# Altium PCB RYA_ESC.PcbDoc (part 1 of 4)
Units mm, origin at the board's own origin, x right, y up, seen from the top; angles counter-clockwise.
Board outline 81.86 x 50.16 mm, 4 copper layers (Top Layer, Signal1, Signal2, Bottom Layer), stack 1.586 mm thick; 309 components, 155 nets, 862 pads, 372 vias.
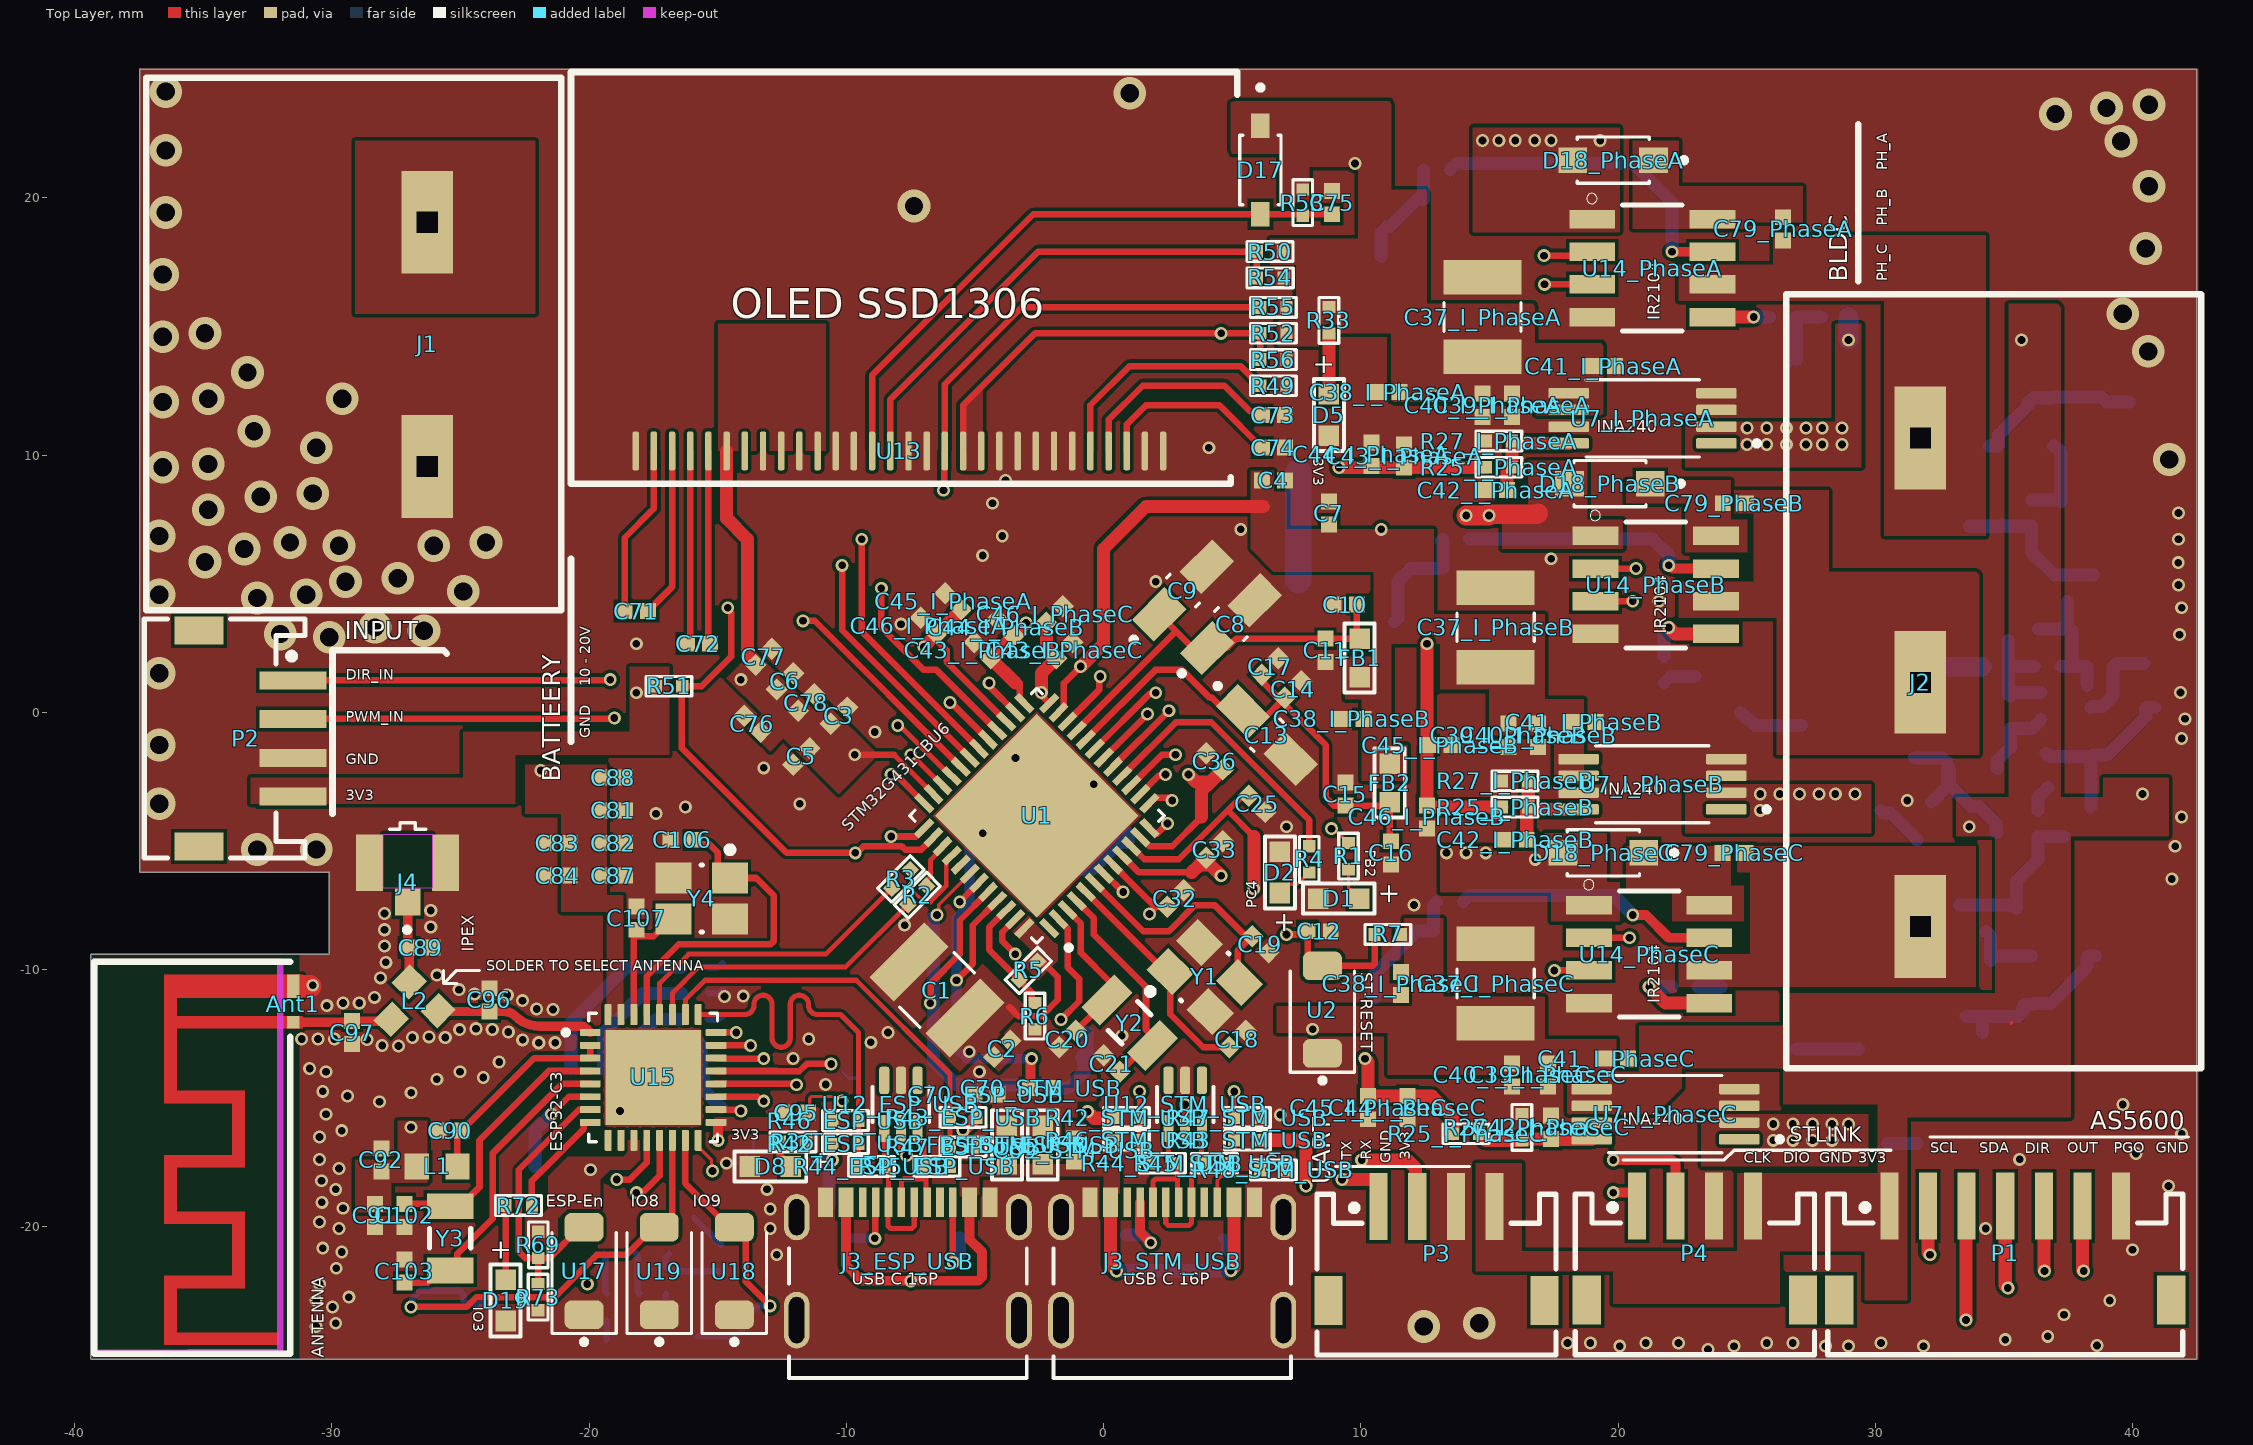
[diagram p0: Top Layer view]
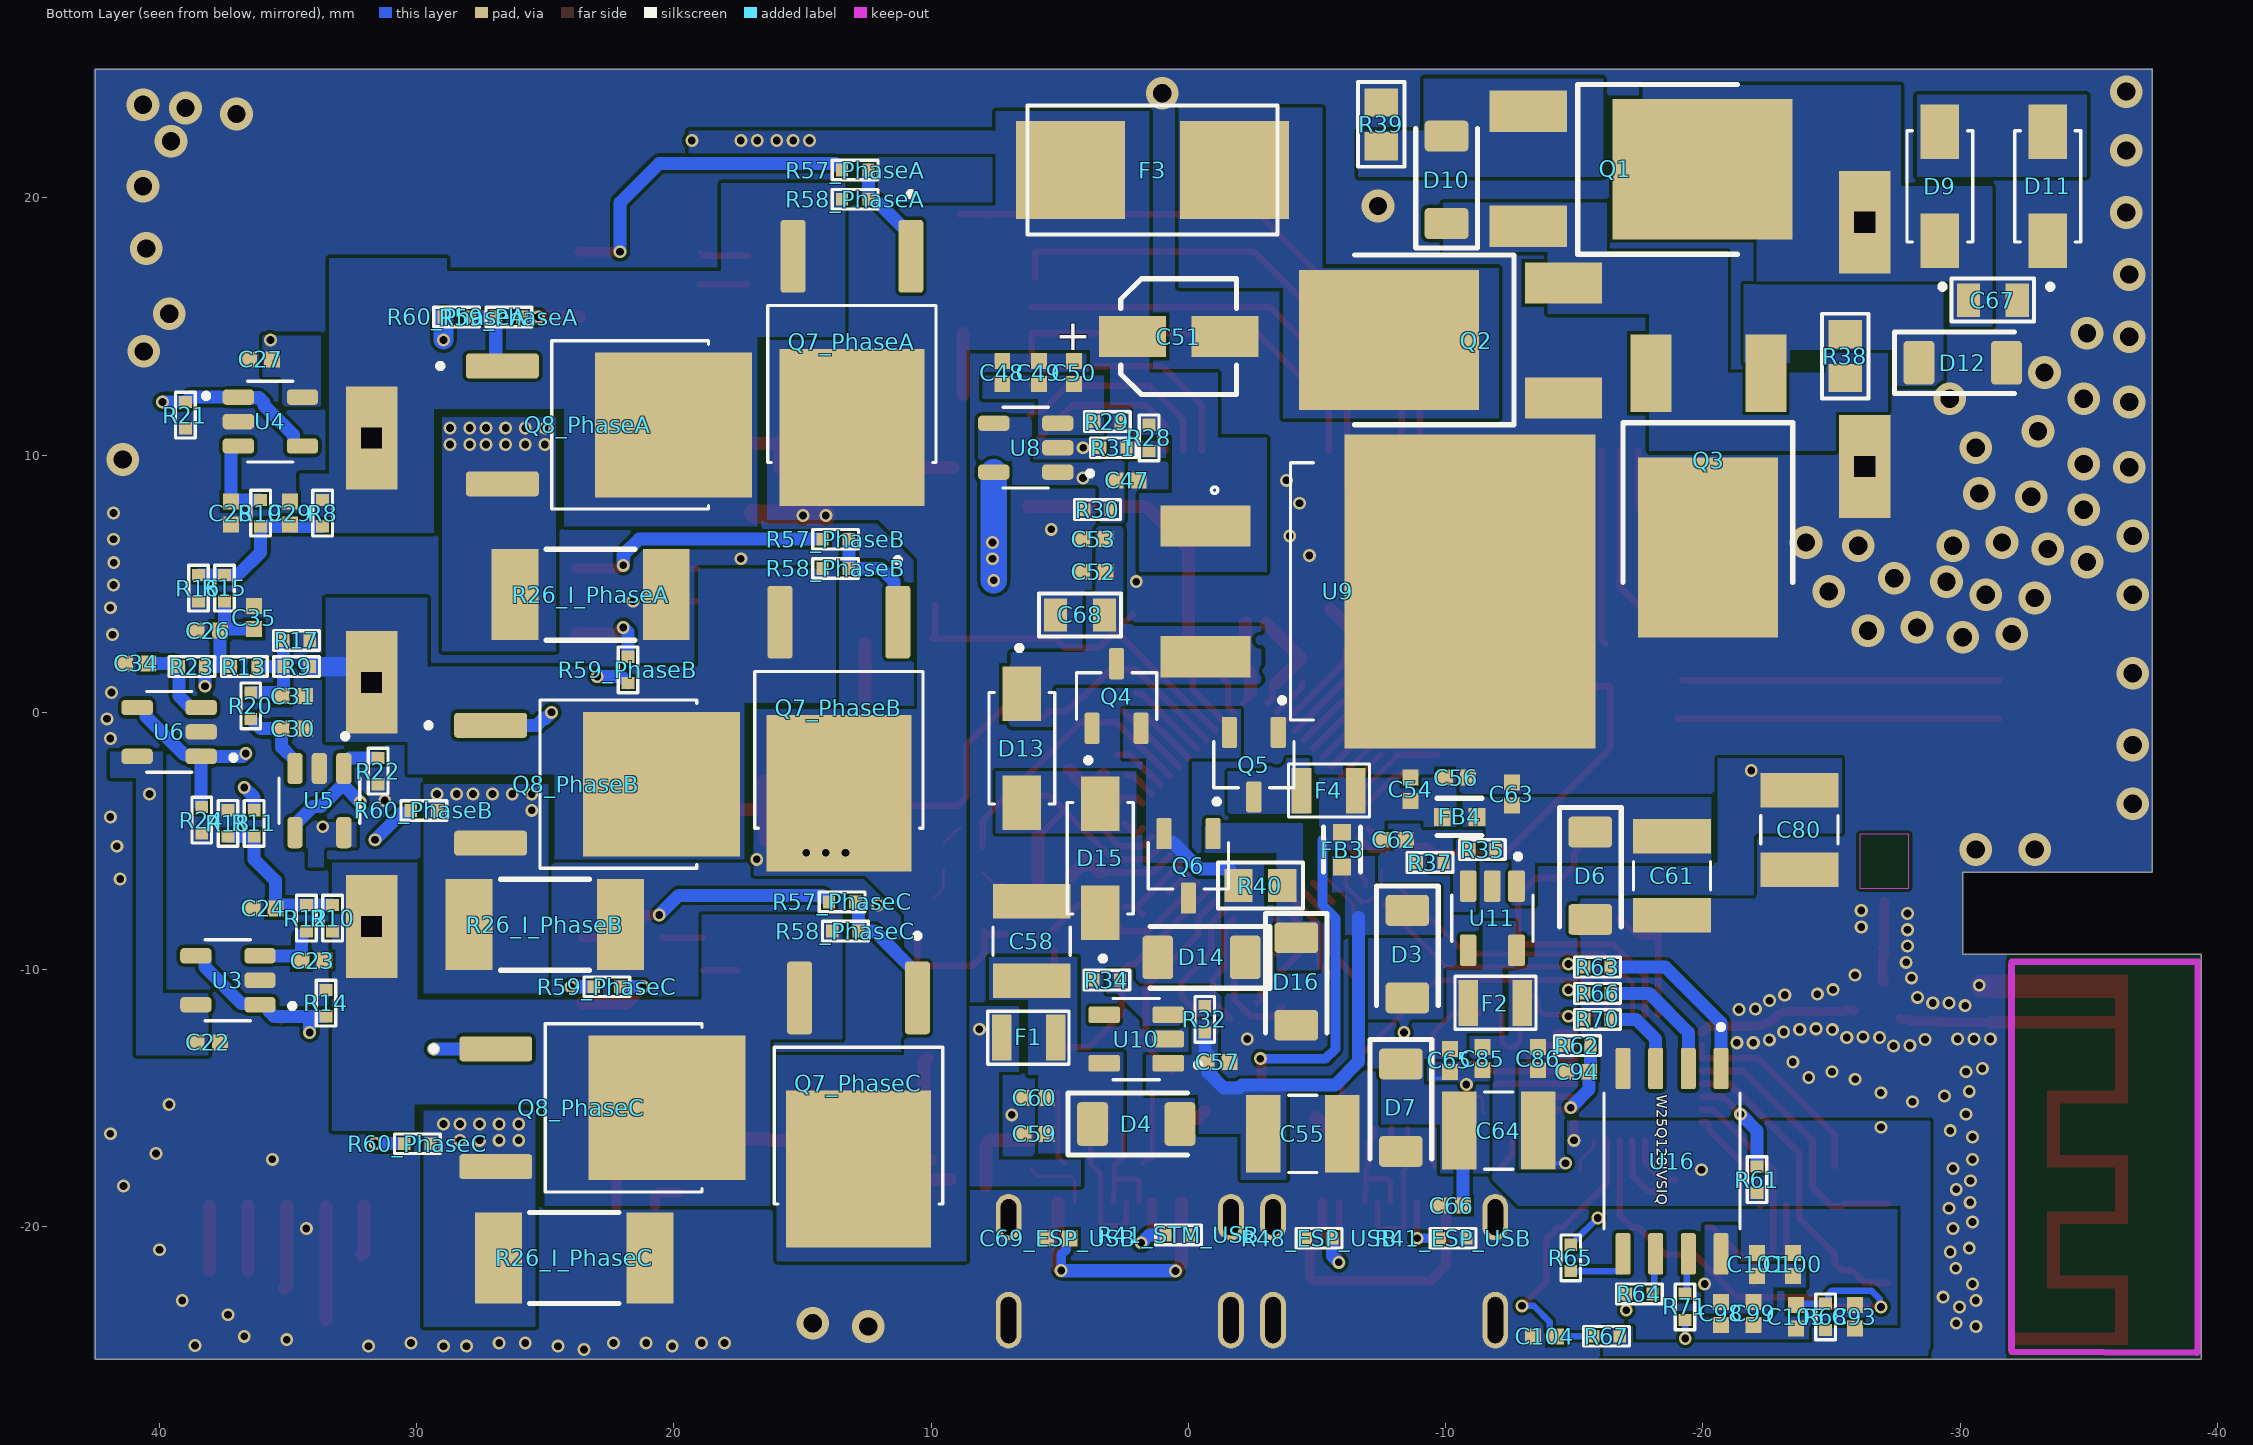
[diagram p1: Bottom Layer view, seen from below]
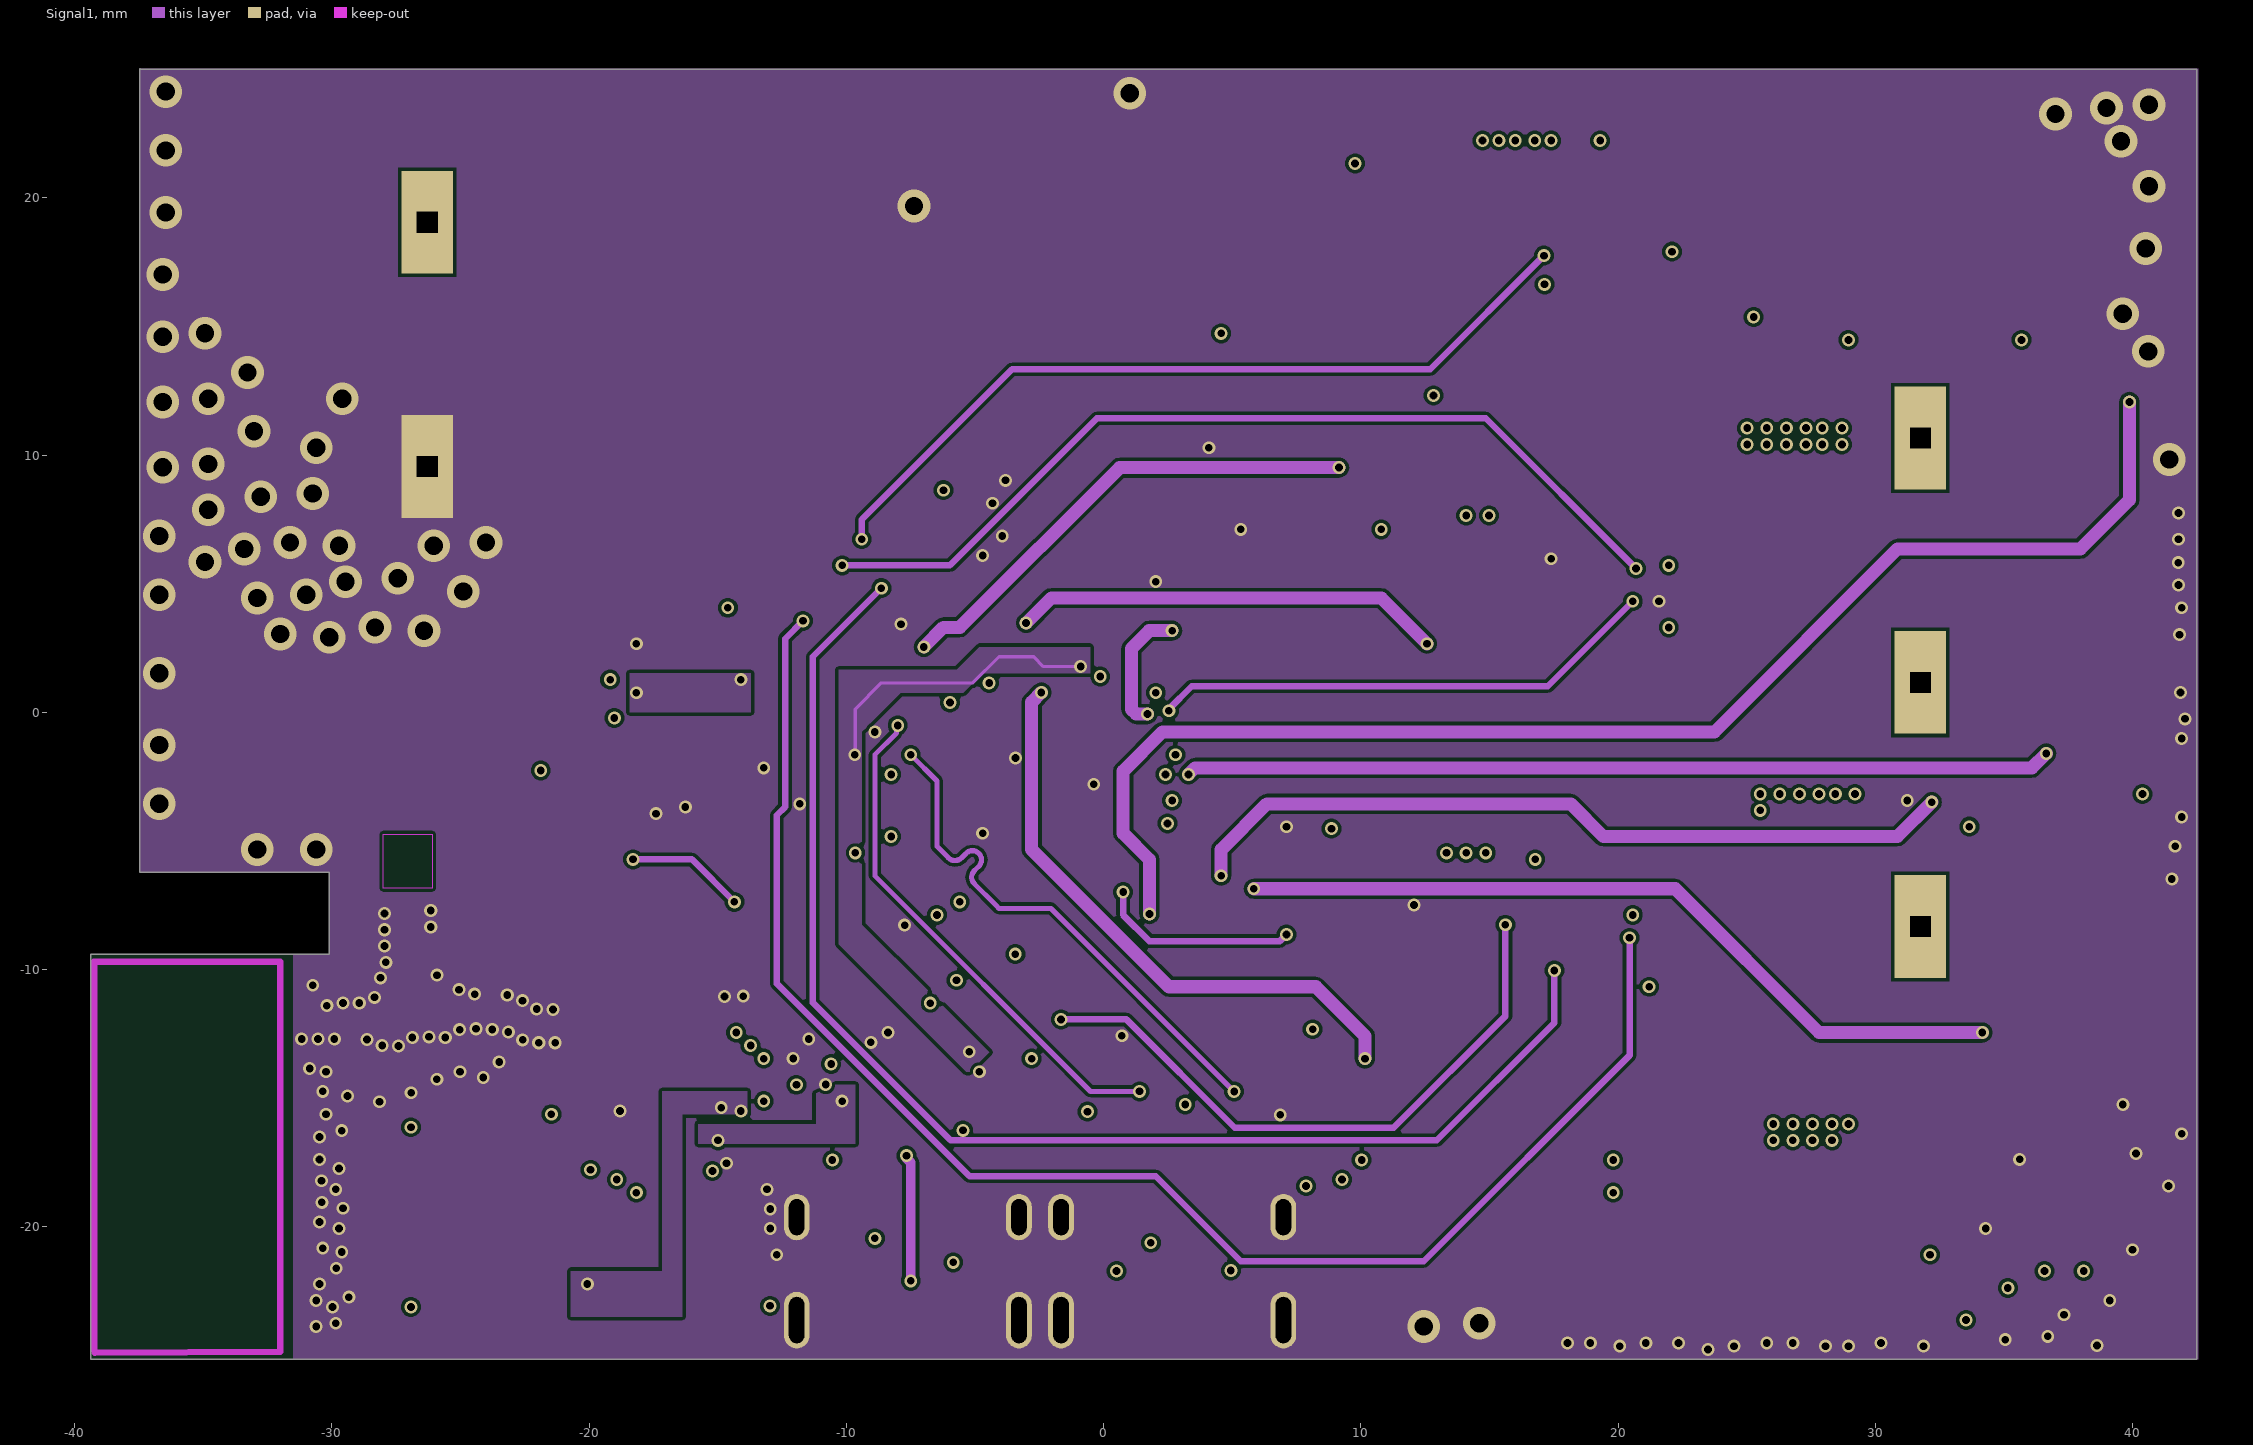
[diagram p2: Signal1]
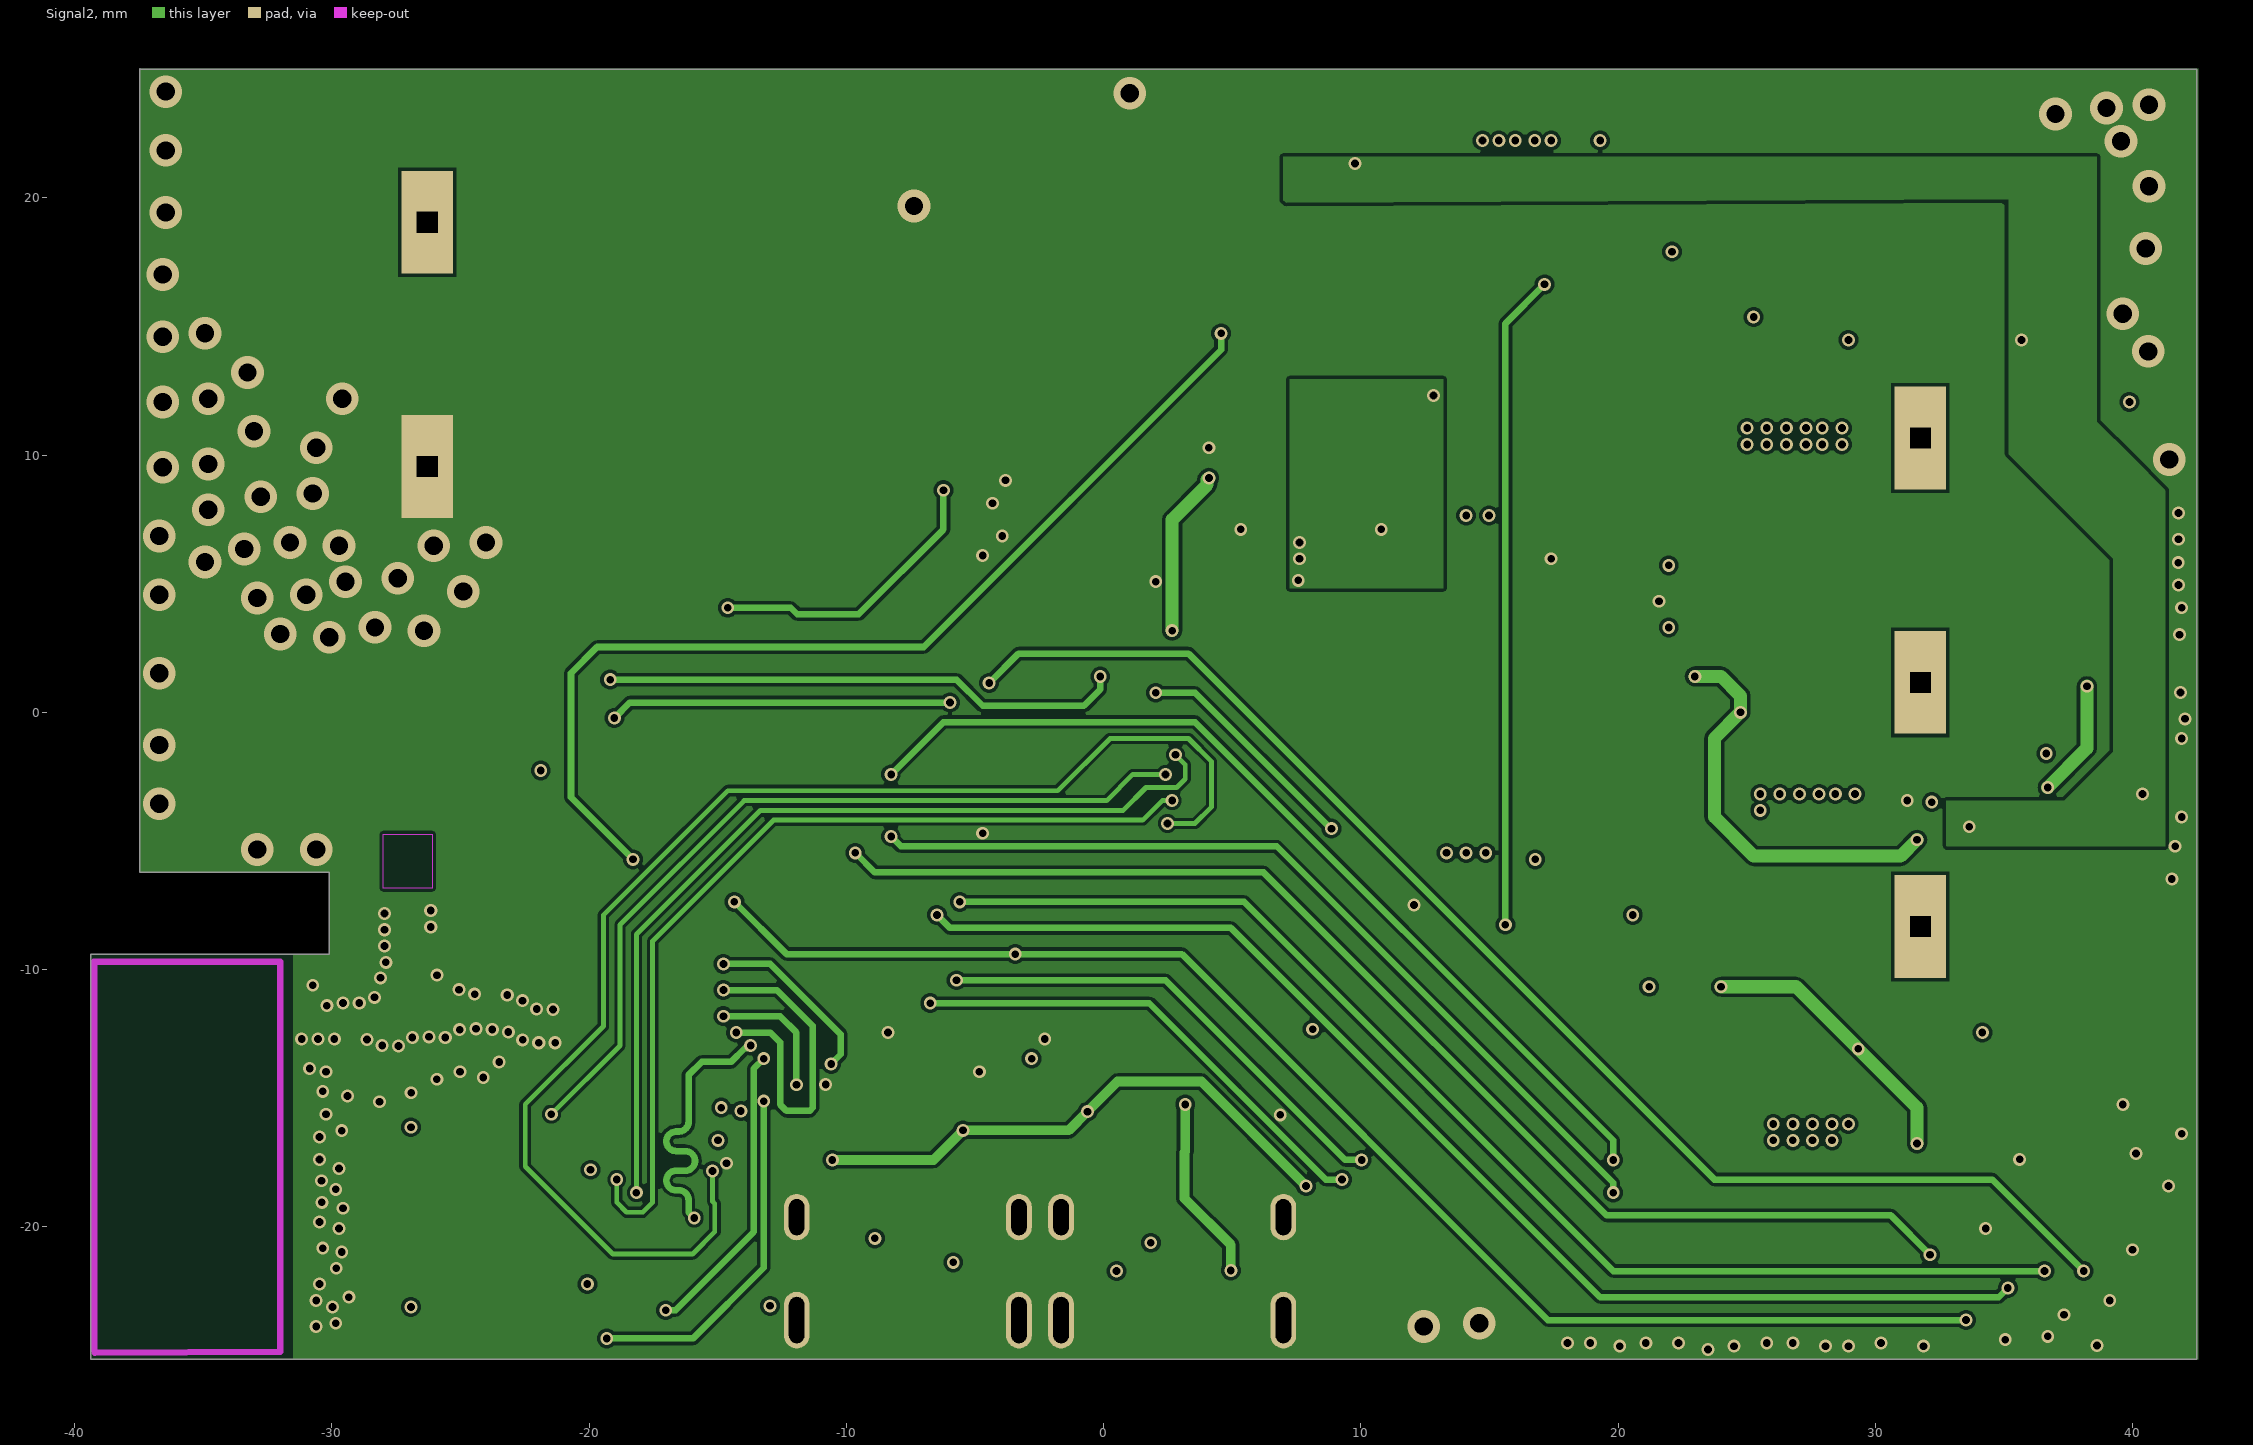
[diagram p3: Signal2]
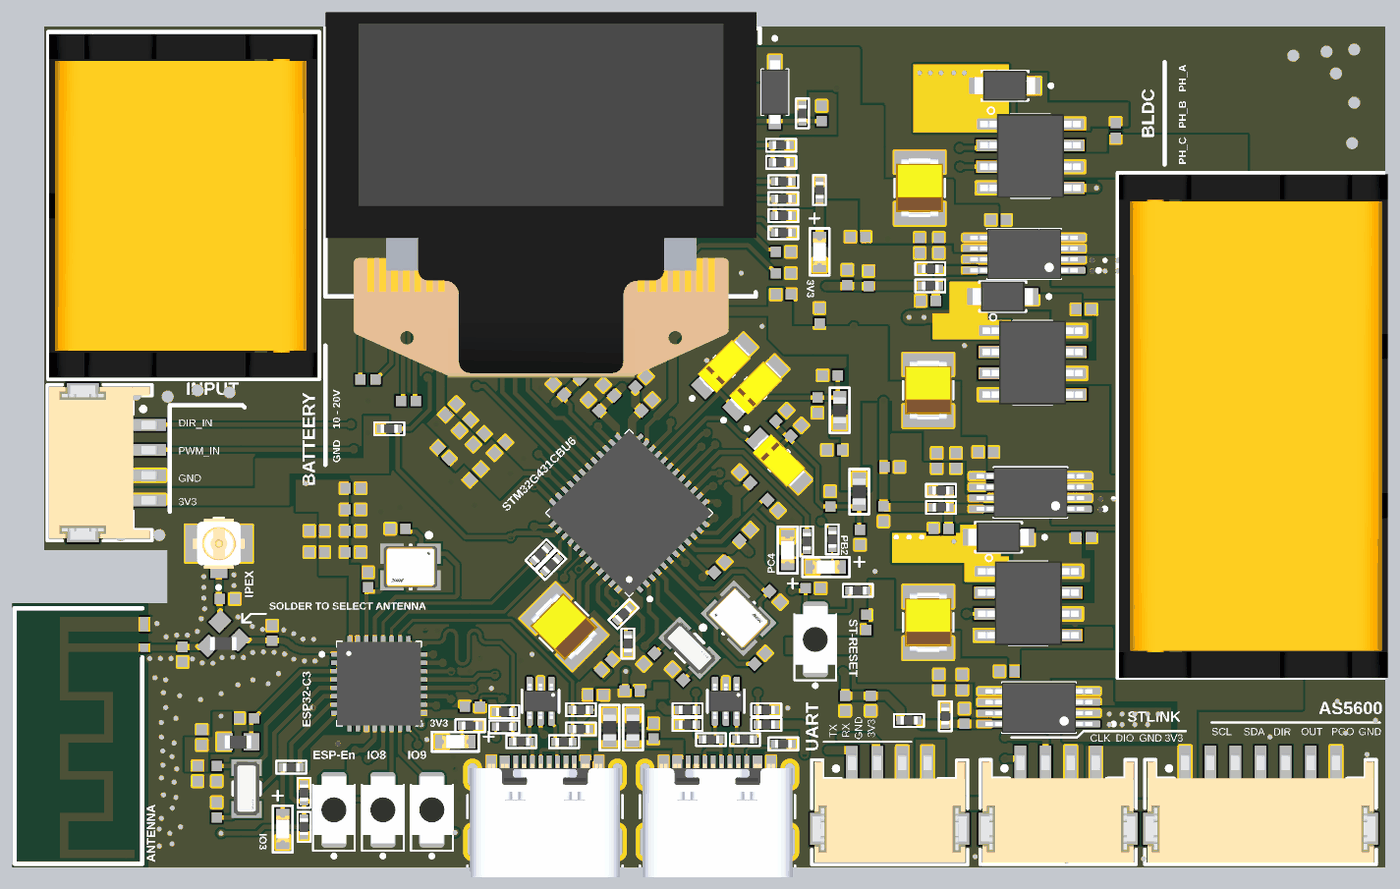
[diagram p6: 3D render of the assembled board from above, using the file's embedded part models]
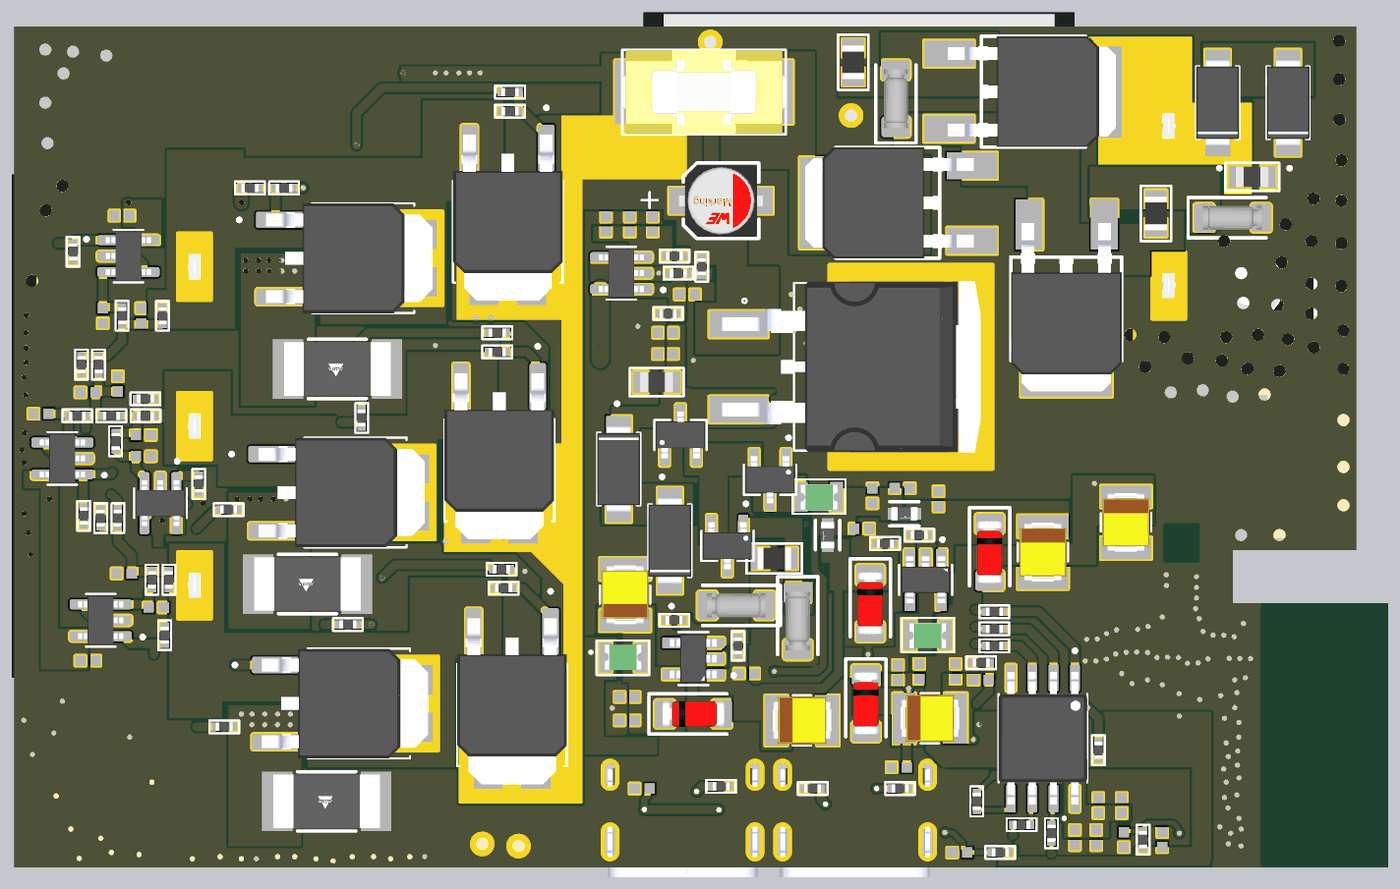
[diagram p7: 3D render of the assembled board from below, using the file's embedded part models]

## Layer stack, top to bottom
Top Solder: solder mask 0.0102, Solder Resist, Dk 3.5
Top Layer: signal copper 0.035
Dielectric 2: prepreg 0.2104, PP-022, Dk 4.5
Signal1: signal copper 0.0152
Dielectric 1: dielectric 1.065, FR-4, Dk 4.6
Signal2: signal copper 0.0152
Dielectric 3: prepreg 0.2104, PP-022, Dk 4.5
Bottom Layer: signal copper 0.035
Bottom Solder: solder mask 0.0102, Solder Resist, Dk 3.5

## Board outline
-39.37,-25.146 -39.37,-9.398 -30.099,-9.398 -30.099,-6.223 -37.465,-6.223 -37.465,25.019 -37.446,25 42.491,25 42.491,-25.146

## Design rules (kind name [scope] priority, off if disabled: settings)
Clearance PolyGND_Clearance [InNet('GND')] p1: gap=0.127 ignorepadtopadclearanceinfootprint=FALSE except(0: SMDPad-Via)
Clearance [All] p2: gap=0.127 ignorepadtopadclearanceinfootprint=FALSE except(0: SMDPad-Via)
DiffPairsRouting [All] p1: maxlimit=0.254 minlimit=0.254 mostfreqgap=0.254 toplayer_minwidth=0.2 toplayer_maxwidth=0.381 toplayer_prefwidth=0.2 midlayer1_minwidth=0.2 midlayer1_maxwidth=0.381 midlayer1_prefwidth=0.2 midlayer2_minwidth=0.2 midlayer2_maxwidth=0.381 midlayer2_prefwidth=0.2 bottomlayer_minwidth=0.2 bottomlayer_maxwidth=0.381 bottomlayer_prefwidth=0.2 maxuncoupledlength=12.7
HoleSize [All] p1: absolutevalues=TRUE maxlimit=500 minlimit=0.025 maxpercent=80.000 minpercent=20.000
HoleToHoleClearance [All] p1: gap=0.127 allowstackedmicrovias=TRUE
MatchedLengths "Schematic Matched Net Lengths_1" [InDifferentialPairClass('USB_Out')] p1: tolerance=25.4 checknetsindiffpair=FALSE checkdiffpairvsdiffpair=TRUE checkxsignals=TRUE checkothers=TRUE usedelayunits=TRUE delaytolerance=5.000000
MatchedLengths "Schematic Matched Net Lengths" [InDifferentialPairClass('USB_In')] p2: tolerance=25.4 checknetsindiffpair=FALSE checkdiffpairvsdiffpair=TRUE checkxsignals=TRUE checkothers=TRUE usedelayunits=TRUE delaytolerance=5.000000
MinimumSolderMaskSliver [All] p1: minsoldermaskwidth=0.001
PlaneConnect [All] p1: planeconnectstyle=Relief reliefexpansion=1.08 reliefentries=4 reliefconductorwidth=1.254 reliefairgap=0.254
PolygonConnect [All] p1: connectstyle=Direct reliefconductorwidth=1.95 reliefentries=4 polygonreliefangle="90 Angle" airgapwidth=0.254
RoutingVias [All] p1: holewidth=0.3 width=0.7 viastyle="Through Hole" minholewidth=0.3 minwidth=0.7 maxholewidth=30 maxwidth=0.7
ShortCircuit InvertFAntenna [InNet('Antenna')] p1: allowed=TRUE
ShortCircuit [All] p2: allowed=FALSE
SilkToSilkClearance [All] p1: silktosilkclearance=0
SilkToSolderMaskClearance [IsPad] p1: minsilkscreentomaskgap=0 clearancetoexposedcopper=TRUE
SolderMaskExpansion [All] p1: expansion=0.102 istentingtop=FALSE
SupplyNets "Schematic Supply Nets_10" [InNet('3V3_2')] p1: voltage=0.000
SupplyNets "Schematic Supply Nets_5" [InNet('3V3_1')] p2: voltage=0.000
SupplyNets "Schematic Supply Nets_9" [InNet('VHin')] p3: voltage=0.000
SupplyNets "Schematic Supply Nets_8" [InNet('USB5V')] p4: voltage=0.000
SupplyNets "Schematic Supply Nets_7" [InNet('BatVoltage')] p5: voltage=0.000
SupplyNets "Schematic Supply Nets_6" [InNet('GND')] p6: voltage=0.000
SupplyNets "Schematic Supply Nets_4" [InNet('MCU3V3')] p7: voltage=0.000
SupplyNets "Schematic Supply Nets_3" [InNet('5Vout')] p8: voltage=0.000
SupplyNets "Schematic Supply Nets_2" [InNet('5Vin')] p9: voltage=0.000
SupplyNets "Schematic Supply Nets_1" [InNet('Wifi_SPI_3V3')] p10: voltage=0.000
Width "Schematic Width Constraint_4" [InNet('NetD10_K')] p1: maxlimit=2.54 minlimit=1.27 preferedwidth=1.27
Width "Schematic Width Constraint" [InNet('NetD14_K')] p2: maxlimit=25.4 minlimit=0.127 preferedwidth=0.508
Width "Schematic Width Constraint_3" [InNetClass('Motor Power')] p3: maxlimit=2.54 minlimit=0.762 preferedwidth=0.762
Width [All] p4: maxlimit=100 minlimit=0.127 preferedwidth=0.127
22 further rules are at their usual default settings.

## Classes and differential pairs
net class ISense: I_PhaseA I_PhaseB I_PhaseC
net class BEMF: NeuSig PhASig PhBSig PhCSig
differential pair class USB_Out: DR_ESP_USB DR_STM_USB
differential pair class USB_In: D_ESP_USB D_STM_USB
channel class USB: ESP_USB STM_USB
channel class GateDriver: PhaseA PhaseB PhaseC
channel class CurrentSense: I_PhaseA I_PhaseB I_PhaseC
net class "Motor Power": BatVoltage NetQ8_PhaseA_3 NetQ8_PhaseB_3 NetQ8_PhaseC_3 PhaseA PhaseB PhaseC
component class U_Wifi: Ant1 C80 C81 C82 C83 C84 C85 C86 C87 C88 C89 C90 C91 C92 C93 C94 C95 C96 C97 C98 C99 C100 C101 C102 C103 C104 C105 C106 C107 D19 J4 L1 L2 R61 R62 R63 R64 R65 R66 R67 R68 R69 R70 R71 R72 R73 U15 U16 U17 U18 U19 Y3 Y4
component class U_TopLevelDesign: D1 J1 J2 P1 P2 P3 P4 R1 R2 R3
component class U_Power: C51 C52 C53 C54 C55 C56 C57 C58 C59 C60 C61 C62 C63 C64 C65 C66 D3 D4 D5 D6 D7 D8 F1 F2 FB3 FB4 R32 R33 R34 R35 R36 R37 U9 U10 U11
component class U_OLED: C71 C72 C73 C74 C75 C76 C77 C78 D17 R49 R50 R51 R52 R53 R54 R55 R56 U13
component class U_MCU: C1 C2 C3 C4 C5 C6 C7 C8 C9 C10 C11 C12 C13 C14 C15 C16 C17 C18 C19 C20 C21 D2 FB1 FB2 R4 R5 R6 R7 U1 U2 Y1 Y2
component class U_BattVoltSense: C47 C48 C49 C50 R28 R29 R30 R31 U8
component class U_BackEMF: C22 C23 C24 C25 C26 C27 C28 C29 C30 C31 C32 C33 C34 C35 C36 R8 R9 R10 R11 R12 R13 R14 R15 R16 R17 R18 R19 R20 R21 R22 R23 R24 U3 U4 U5 U6
component class STM_USB: C69_STM_USB C70_STM_USB FB5_STM_USB J3_STM_USB R41_STM_USB R42_STM_USB R43_STM_USB R44_STM_USB R45_STM_USB R46_STM_USB R47_STM_USB R48_STM_USB U12_STM_USB
component class PhaseC: C79_PhaseC D18_PhaseC Q7_PhaseC Q8_PhaseC R57_PhaseC R58_PhaseC R59_PhaseC R60_PhaseC U14_PhaseC
component class PhaseB: C79_PhaseB D18_PhaseB Q7_PhaseB Q8_PhaseB R57_PhaseB R58_PhaseB R59_PhaseB R60_PhaseB U14_PhaseB
component class PhaseA: C79_PhaseA D18_PhaseA Q7_PhaseA Q8_PhaseA R57_PhaseA R58_PhaseA R59_PhaseA R60_PhaseA U14_PhaseA
component class U_5VProtect: C68 D13 D14 D15 D16 F4 Q4 Q5 Q6 R40
component class I_PhaseC: C37_I_PhaseC C38_I_PhaseC C39_I_PhaseC C40_I_PhaseC C41_I_PhaseC C42_I_PhaseC C43_I_PhaseC C44_I_PhaseC C45_I_PhaseC C46_I_PhaseC R25_I_PhaseC R26_I_PhaseC R27_I_PhaseC U7_I_PhaseC
component class I_PhaseB: C37_I_PhaseB C38_I_PhaseB C39_I_PhaseB C40_I_PhaseB C41_I_PhaseB C42_I_PhaseB C43_I_PhaseB C44_I_PhaseB C45_I_PhaseB C46_I_PhaseB R25_I_PhaseB R26_I_PhaseB R27_I_PhaseB U7_I_PhaseB
component class I_PhaseA: C37_I_PhaseA C38_I_PhaseA C39_I_PhaseA C40_I_PhaseA C41_I_PhaseA C42_I_PhaseA C43_I_PhaseA C44_I_PhaseA C45_I_PhaseA C46_I_PhaseA R25_I_PhaseA R26_I_PhaseA R27_I_PhaseA U7_I_PhaseA
component class HighPowerProtect: C67 D9 D10 D11 D12 F3 Q1 Q2 Q3 R38 R39
component class ESP_USB: C69_ESP_USB C70_ESP_USB FB5_ESP_USB J3_ESP_USB R41_ESP_USB R42_ESP_USB R43_ESP_USB R44_ESP_USB R45_ESP_USB R46_ESP_USB R47_ESP_USB R48_ESP_USB U12_ESP_USB
differential pair DR_STM_USB: +DR_STM_USB_P -DR_STM_USB_N
differential pair DR_ESP_USB: +DR_ESP_USB_P -DR_ESP_USB_N
differential pair D_STM_USB: +D_STM_USB_P -D_STM_USB_N
differential pair D_ESP_USB: +D_ESP_USB_P -D_ESP_USB_N

## Components (designator, comment, footprint, x,y, rotation, side; value= is the part's Value field where it differs from the comment)
Ant1 "IFA-2.4Ghz" IFA-2.4Ghz-Footprint-1 -31.5,-10.59 r90 top
C1 "T1411-470uF" CAPPC3528X210N -6.477,-10.795 r135 top value=470µF
C2 "0402-100nF" CAPC0402(1005)60_N -3.937,-13.081 r225 top value=100nF
C3 "0402-100nF" CAPC0402(1005)60_N -10.287,-0.127 r225 top value=100nF
C4 "0402-100nF" CAPC0402(1005)60_N 6.604,9.017 r180 top value=100nF
C5 "0402-100nF" CAPC0402(1005)60_N -11.747,-1.714 r45 top value=100nF
C6 "0402-100nF" CAPC0402(1005)60_N -12.383,1.206 r225 top value=100nF
C7 "0402-4.7uF" CAPC0402(1005)60_N 8.763,7.747 r270 top value=4.7µF
C8 "T1206-10uF" CAPMP3216X180N 4.953,3.429 r45 top value=10µF
C9 "T1206-10uF" CAPMP3216X180N 3.085,4.736 r45 top value=10µF
C10 "0402-100nF" CAPC0402(1005)60_N 9.398,4.191 r0 top value=100nF
C11 "0402-100nF" CAPC0402(1005)60_N 8.636,2.413 r90 top value=100nF
C12 "0402-100nF" CAPC0402(1005)60_N 8.382,-8.509 r180 top value=100nF
C13 "T1206-10uF" CAPMP3216X180N 6.35,-0.889 r315 top value=10µF
C14 "0402-100nF" CAPC0402(1005)60_N 7.366,0.889 r225 top value=100nF
C15 "0402-100nF" CAPC0402(1005)60_N 9.398,-3.175 r270 top value=100nF
C16 "0402-100nF" CAPC0402(1005)60_N 11.176,-5.461 r90 top value=100nF
C17 "0402-10uF" CAPC0402(1005)60_N 6.477,1.778 r225 top value=10µF
C18 "0402-6pF" CAPC0402(1005)60_N 5.207,-12.7 r225 top value=6pF
C19 "0402-6pF" CAPC0402(1005)60_N 6.096,-9.017 r135 top value=6pF
C20 "0402-15pF" CAPC0402(1005)60_N -1.397,-12.7 r45 top value=15pF
C21 "0402-15pF" CAPC0402(1005)60_N 0.318,-13.653 r315 top value=15pF
C22 "0402-1nF" CAPC0402(1005)60_N 38.1,-12.827 r0 bottom value=1nF
C23 "0402-10nF" CAPC0402(1005)60_N 34.036,-9.652 r0 bottom value=10nF
C24 "0402-1nF" CAPC0402(1005)60_N 35.941,-7.62 r180 bottom value=1nF
C25 "0402-1nF" CAPC0402(1005)60_N 5.969,-3.556 r135 top value=1nF
C26 "0402-1nF" CAPC0402(1005)60_N 38.1,3.175 r180 bottom value=1nF
C27 "0402-1nF" CAPC0402(1005)60_N 36.068,13.716 r180 bottom value=1nF
C28 "0402-10nF" CAPC0402(1005)60_N 37.211,7.747 r90 bottom value=10nF
C29 "0402-1nF" CAPC0402(1005)60_N 34.925,7.747 r270 bottom value=1nF
C30 "0402-10nF" CAPC0402(1005)60_N 34.798,-0.635 r0 bottom value=10nF
C31 "0402-1nF" CAPC0402(1005)60_N 34.798,0.635 r0 bottom value=1nF
C32 "0402-1nF" CAPC0402(1005)60_N 2.794,-7.239 r225 top value=1nF
C33 "0402-1nF" CAPC0402(1005)60_N 4.318,-5.334 r225 top value=1nF
C34 "0402-10nF" CAPC0402(1005)60_N 40.894,1.905 r180 bottom value=10nF
C35 "0402-1nF" CAPC0402(1005)60_N 36.322,3.683 r270 bottom value=1nF
C36 "0402-1nF" CAPC0402(1005)60_N 4.318,-1.905 r315 top value=1nF
C37_I_PhaseA "T1411-100uF" CAPPC3528X210N 14.732,15.367 r90 top value=100µF (schematic designator C37)
C37_I_PhaseB "T1411-100uF" CAPPC3528X210N 15.24,3.302 r90 top value=100µF (schematic designator C37)
C37_I_PhaseC "T1411-100uF" CAPPC3528X210N 15.24,-10.541 r90 top value=100µF (schematic designator C37)
C38_I_PhaseA "0402-10uF" CAPC0402(1005)60_N 11.049,12.446 r0 top value=10µF (schematic designator C38)
C38_I_PhaseB "0402-10uF" CAPC0402(1005)60_N 9.652,-0.254 r0 top value=10µF (schematic designator C38)
C38_I_PhaseC "0402-10uF" CAPC0402(1005)60_N 11.557,-10.541 r90 top value=10µF (schematic designator C38)
C39_I_PhaseA "0402-10uF" CAPC0402(1005)60_N 15.875,11.938 r90 top value=10µF (schematic designator C39)
C39_I_PhaseB "0402-10uF" CAPC0402(1005)60_N 15.748,-0.889 r90 top value=10µF (schematic designator C39)
C39_I_PhaseC "0402-10uF" CAPC0402(1005)60_N 17.272,-14.097 r90 top value=10µF (schematic designator C39)
C40_I_PhaseA "0402-10nF" CAPC0402(1005)60_N 14.732,11.938 r90 top value=10nF (schematic designator C40)
C40_I_PhaseB "0402-10nF" CAPC0402(1005)60_N 16.891,-0.889 r90 top value=10nF (schematic designator C40)
C40_I_PhaseC "0402-10nF" CAPC0402(1005)60_N 15.875,-14.097 r90 top value=10nF (schematic designator C40)
C41_I_PhaseA "0402-10nF" CAPC0402(1005)60_N 19.431,13.462 r180 top value=10nF (schematic designator C41)
C41_I_PhaseB "0402-10nF" CAPC0402(1005)60_N 18.669,-0.381 r180 top value=10nF (schematic designator C41)
C41_I_PhaseC "0402-10nF" CAPC0402(1005)60_N 19.939,-13.462 r180 top value=10nF (schematic designator C41)
C42_I_PhaseA "0402-1nF" CAPC0402(1005)60_N 15.24,8.636 r0 top value=1nF (schematic designator C42)
C42_I_PhaseB "0402-1nF" CAPC0402(1005)60_N 16.002,-4.953 r0 top value=1nF (schematic designator C42)
C42_I_PhaseC "0402-1nF" CAPC0402(1005)60_N 17.399,-16.129 r270 top value=1nF (schematic designator C42)
C43_I_PhaseA "0402-10nF" CAPC0402(1005)60_N 11.684,9.964 r270 top value=10nF (schematic designator C43)
C43_I_PhaseB "0402-10nF" CAPC0402(1005)60_N -4.699,2.413 r315 top value=10nF (schematic designator C43)
C43_I_PhaseC "0402-10nF" CAPC0402(1005)60_N -1.524,2.413 r225 top value=10nF (schematic designator C43)
C44_I_PhaseA "0402-10nF" CAPC0402(1005)60_N 10.414,10.033 r270 top value=10nF (schematic designator C44)
C44_I_PhaseB "0402-10nF" CAPC0402(1005)60_N -3.81,3.302 r315 top value=10nF (schematic designator C44)
C44_I_PhaseC "0402-10nF" CAPC0402(1005)60_N 11.811,-15.367 r90 top value=10nF (schematic designator C44)
C45_I_PhaseA "0402-10nF" CAPC0402(1005)60_N -5.842,4.318 r315 top value=10nF (schematic designator C45)
C45_I_PhaseB "0402-10nF" CAPC0402(1005)60_N 13.081,-1.27 r180 top value=10nF (schematic designator C45)
C45_I_PhaseC "0402-10nF" CAPC0402(1005)60_N 10.287,-15.367 r90 top value=10nF (schematic designator C45)
C46_I_PhaseA "0402-10nF" CAPC0402(1005)60_N -6.794,3.365 r315 top value=10nF (schematic designator C46)
C46_I_PhaseB "0402-10nF" CAPC0402(1005)60_N 12.573,-4.064 r90 top value=10nF (schematic designator C46)
C46_I_PhaseC "0402-10nF" CAPC0402(1005)60_N -1.905,3.81 r225 top value=10nF (schematic designator C46)
C47 "0402-10uF" CAPC0402(1005)60_N 2.388,9.017 r0 bottom value=10µF
C48 "0402-10uF" CAPC0402(1005)60_N 7.239,13.208 r270 bottom value=10µF
C49 "0402-10uF" CAPC0402(1005)60_N 5.817,13.208 r270 bottom value=10µF
C50 "0402-10uF" CAPC0402(1005)60_N 4.445,13.208 r270 bottom value=10µF
C51 "865080140002" WCAP-ASLI_D4H5.5 0.381,14.605 r0 bottom value="47uF, 6.3V"
C52 "0402-1uF" CAPC0402(1005)60_N 3.683,5.461 r180 bottom value=1µF
C53 "0402-10uF" CAPC0402(1005)60_N 3.683,6.731 r180 bottom value=10µF
C54 "0402-1uF" CAPC0402(1005)60_N -8.636,-2.99 r270 bottom value=1µF
C55 "T1411-100uF" CAPPC3528X210N -4.445,-16.383 r180 bottom value=100µF
C56 "0402-100nF" CAPC0402(1005)60_N -10.414,-2.54 r0 bottom value=100nF
C57 "0402-100nF" CAPC0402(1005)60_N -1.143,-13.589 r0 bottom value=100nF
C58 "T1411-100uF" CAPPC3528X210N 6.096,-8.89 r90 bottom value=100µF
C59 "0402-1uF" CAPC0402(1005)60_N 5.969,-16.383 r180 bottom value=1µF
C60 "0402-10uF" CAPC0402(1005)60_N 5.969,-14.986 r180 bottom value=10µF
C61 "T1411-100uF" CAPPC3528X210N -18.796,-6.35 r270 bottom value=100µF
C62 "0402-100nF" CAPC0402(1005)60_N -8.001,-4.953 r0 bottom value=100nF
C63 "0402-100nF" CAPC0402(1005)60_N -12.573,-3.175 r270 bottom value=100nF
C64 "T1411-100uF" CAPPC3528X210N -12.065,-16.256 r180 bottom value=100µF
C65 "0402-1uF" CAPC0402(1005)60_N -10.16,-13.531 r90 bottom value=1µF
C66 "0402-10uF" CAPC0402(1005)60_N -10.229,-19.177 r180 bottom value=10µF
C67 "0108051041050" CAP_0805 -31.242,16.002 r0 bottom value=100nF
C68 "0108051041050" CAP_0805 4.191,3.81 r180 bottom value=100nF
C69_ESP_USB "0402-10uF" CAPC0402(1005)60_N 5.08,-20.447 r180 bottom value=10µF (schematic designator C69)
C69_STM_USB "0402-10uF" CAPC0402(1005)60_N -1.143,-17.018 r270 top value=10µF (schematic designator C69)
C70_ESP_USB "0402-100nF" CAPC0402(1005)60_N -4.572,-14.859 r0 top value=100nF (schematic designator C70)
C70_STM_USB "0402-100nF" CAPC0402(1005)60_N -2.413,-14.605 r180 top value=100nF (schematic designator C70)
C71 "0402-1uF" CAPC0402(1005)60_N -18.161,3.937 r180 top value=1µF
C72 "0402-1uF" CAPC0402(1005)60_N -15.748,2.667 r180 top value=1µF
C73 "0402-4.7uF" CAPC0402(1005)60_N 6.604,11.557 r180 top value=4.7µF
C74 "0402-2.2uF" CAPC0402(1005)60_N 6.604,10.287 r180 top value=2.2µF
C75 "0402-1uF" CAPC0402(1005)60_N 8.89,19.812 r270 top value=1µF
C76 "0402-1uF" CAPC0402(1005)60_N -13.652,-0.445 r315 top value=1µF
C77 "0402-1uF" CAPC0402(1005)60_N -13.208,2.159 r225 top value=1µF
C78 "0402-1uF" CAPC0402(1005)60_N -11.557,0.381 r225 top value=1µF
C79_PhaseA "0402-22uF" CAPC0402(1005)60_N 26.416,18.796 r270 top value=22µF (schematic designator C79)
C79_PhaseB "0402-22uF" CAPC0402(1005)60_N 24.521,8.128 r0 top value=22µF (schematic designator C79)
C79_PhaseC "0402-22uF" CAPC0402(1005)60_N 24.511,-5.461 r0 top value=22µF (schematic designator C79)
C80 "T1411-470uF" CAPPC3528X210N -23.749,-4.572 r270 bottom value=470µF
C81 "0402-1uF" CAPC0402(1005)60_N -19.05,-3.81 r180 top value=1µF
C82 "0402-1uF" CAPC0402(1005)60_N -19.05,-5.08 r180 top value=1µF
C83 "0402-1uF" CAPC0402(1005)60_N -21.209,-5.08 r0 top value=1µF
C84 "0402-10uF" CAPC0402(1005)60_N -21.209,-6.35 r0 top value=10µF
C85 "0402-10uF" CAPC0402(1005)60_N -11.43,-13.462 r90 bottom value=10µF
C86 "0402-10uF" CAPC0402(1005)60_N -13.589,-13.462 r90 bottom value=10µF
C87 "0402-1uF" CAPC0402(1005)60_N -19.05,-6.35 r180 top value=1µF
C88 "0402-10nF" CAPC0402(1005)60_N -19.05,-2.54 r180 top value=10nF
C89 "0402-1pF" CAPC0402(1005)60_N -26.543,-9.144 r180 top value=1pF
C90 "0402-1uF" CAPC0402(1005)60_N -25.4,-16.256 r0 top value=1µF
C91 "0402-100nF" CAPC0402(1005)60_N -28.321,-19.558 r90 top value=100nF
C92 "0402-10uF" CAPC0402(1005)60_N -28.067,-17.399 r270 top value=10µF
C93 "0402-100nF" CAPC0402(1005)60_N -25.908,-23.495 r270 bottom value=100nF
C94 "0402-1uF" CAPC0402(1005)60_N -15.117,-13.97 r180 bottom value=1µF
C95 "0402-100nF" CAPC0402(1005)60_N -11.938,-15.557 r0 top value=100nF
C96 "0402-1pF" CAPC0402(1005)60_N -23.876,-11.176 r270 top value=1pF
C97 "0402-1pF" CAPC0402(1005)60_N -29.21,-12.446 r90 top value=1pF
C98 "0402-1uF" CAPC0402(1005)60_N -20.701,-23.368 r90 bottom value=1µF
C99 "0402-1uF" CAPC0402(1005)60_N -21.971,-23.368 r90 bottom value=1µF
C100 "0402-10nF" CAPC0402(1005)60_N -23.495,-21.463 r270 bottom value=10nF
C101 "0402-10nF" CAPC0402(1005)60_N -22.098,-21.463 r270 bottom value=10nF
C102 "0402-15pF" CAPC0402(1005)60_N -27.178,-19.558 r90 top value=15pF
C103 "0402-15pF" CAPC0402(1005)60_N -27.178,-21.717 r270 top value=15pF
C104 "0402-100nF" CAPC0402(1005)60_N -13.843,-24.257 r180 bottom value=100nF
C105 "0402-100nF" CAPC0402(1005)60_N -23.622,-23.495 r90 bottom value=100nF
C106 "0402-6pF" CAPC0402(1005)60_N -16.383,-4.953 r0 top value=6pF
C107 "0402-6pF" CAPC0402(1005)60_N -18.161,-8.001 r270 top value=6pF
D1 "160603WhiteBlur" WL-SMCW_0603_H=0.7mm 9.144,-7.239 r0 top value=White
D2 "160603WhiteBlur" WL-SMCW_0603_H=0.7mm 6.858,-6.223 r270 top value=White
D3 "ZMM5.1" SOD-80_MiniMELF_Glass -8.509,-9.398 r270 bottom value=5.1V
D4 "ZMM3.6" SOD-80_MiniMELF_Glass 2.032,-16.002 r180 bottom value=3.6V
D5 "160603RedBlur" WL-SMCW_0603_H=0.7mm 8.763,11.557 r90 top value="Red, 2V"
D6 "ZMM5.1" SOD-80_MiniMELF_Glass -15.621,-6.35 r270 bottom value=5.1V
D7 "ZMM3.6" SOD-80_MiniMELF_Glass -8.255,-15.367 r270 bottom value=3.6V
D8 "160603RedBlur" WL-SMCW_0603_H=0.7mm -12.954,-17.653 r0 top value="Red, 2V"
D9 "SMAJ18A" DIOM4325X250N -29.21,20.447 r90 bottom
D10 "ZMM18" SOD-80_MiniMELF_Glass -10.033,20.701 r90 bottom value=Shottky-Diode
D11 "SMAJ18A" DIOM4325X250N -33.401,20.447 r90 bottom
D12 "ZMM18" SOD-80_MiniMELF_Glass -30.099,13.589 r180 bottom value=Shottky-Diode
D13 "SMAJ18A" DIOM4325X250N 6.477,-1.397 r270 bottom
D14 "ZMM18" SOD-80_MiniMELF_Glass -0.508,-9.525 r0 bottom value=Shottky-Diode
D15 "SMAJ18A" DIOM4325X250N 3.429,-5.671 r90 bottom
D16 "ZMM18" SOD-80_MiniMELF_Glass -4.191,-10.463 r270 bottom value=Shottky-Diode
D17 "1N4148W" SODFL3816X120N 6.096,21.082 r270 top
D18_PhaseA "1N5819W" 1N5819W 19.812,21.463 r180 top (schematic designator D18)
D18_PhaseB "1N5819W" 1N5819W 19.685,8.89 r180 top (schematic designator D18)
D18_PhaseC "1N5819W" 1N5819W 19.431,-5.461 r180 top (schematic designator D18)
D19 "160603WhiteBlur" WL-SMCW_0603_H=0.7mm -23.241,-22.86 r90 top value=White
F1 "0805,0.5A" Fuse_SMD_0805 6.223,-12.636 r0 bottom value="6V,  0.5A"
F2 "0805,0.5A" Fuse_SMD_0805 -11.938,-11.303 r180 bottom value="6V,  0.5A"
F3 "1808Fuse" 0154007.DR 1.397,21.082 r0 bottom
F4 "060805100006" Fuse_SMD_0805 -5.461,-3.048 r180 bottom value="6V,  1A"
FB1 "03060360110225" FER_0603 10.033,2.159 r90 top
FB2 "03060360110225" FER_0603 11.049,-2.794 r270 top
FB3 "BLM18PG121SN1D" FP-BLM18-0_15-t0_8-MFG -5.969,-5.334 r270 bottom
FB4 "BLM18PG121SN1D" FP-BLM18-0_15-t0_8-MFG -10.541,-4.064 r180 bottom
FB5_ESP_USB "03060360110225" FER_0603 -2.286,-16.764 r90 top (schematic designator FB5)
FB5_STM_USB "03060360110225" FER_0603 -3.683,-16.764 r90 top (schematic designator FB5)
J1 "HB9500-2" HB9500-2 -26.289,9.55 r90 top
J2 "HB9500-3" HB9500-3 31.75,10.668 r270 top
J3_ESP_USB "TypeC-16P" MOLEX_2171790001 -7.607,-22.475 r0 top (schematic designator J3)
J3_STM_USB "TypeC-16P" MOLEX_2171790001 2.671,-22.475 r0 top (schematic designator J3)
J4 "20279-001E-03" IPEX_20279-001E-03 -27.051,-5.842 r0 top
L1 "0603-2nH" INDC1608X80N -25.908,-17.653 r180 top value=2nH
L2 "Select 0603-2nH" "Copy of INDC1608X80N" -26.429,-11.04 r315 top value=2nH
P1 "648107131822" 648107131822 35.052,-21.844 r0 top value="1A, 50 V (AC)"
P2 "648104131822" 648104131822 -34.163,-1.016 r270 top value="1A, 50 V (AC)"
P3 "648104131822" 648104131822 12.945,-21.86 r0 top value="1A, 50 V (AC)"
P4 "648104131822" 648104131822 22.987,-21.844 r0 top value="1A, 50 V (AC)"
Q1 "AOD4185" DPAK -18.136,21.107 r270 bottom
Q2 "AOD4185" DPAK -9.652,14.478 r90 bottom
Q3 "AOD4185" DPAK -20.193,8.255 r0 bottom
Q4 "AO3407A" SOT95P280X125-3N 2.794,0.635 r90 bottom
Q5 "AO3407A" SOT95P280X125-3N -2.54,-2.032 r270 bottom
Q6 "AO3407A" SOT95P280X125-3N 0,-5.969 r270 bottom
Q7_PhaseA "IRLR7843TRPBF" TO229P990X239-3_4N 13.081,13.589 r270 bottom (schematic designator Q7)
Q7_PhaseB "IRLR7843TRPBF" TO229P990X239-3_4N 13.589,-0.635 r270 bottom (schematic designator Q7)
Q7_PhaseC "IRLR7843TRPBF" TO229P990X239-3_4N 12.827,-15.24 r270 bottom (schematic designator Q7)
Q8_PhaseA "IRLR7843TRPBF" TO229P990X239-3_4N 22.53,11.172 r180 bottom (schematic designator Q8)
Q8_PhaseB "IRLR7843TRPBF" TO229P990X239-3_4N 22.987,-2.794 r180 bottom (schematic designator Q8)
Q8_PhaseC "IRLR7843TRPBF" TO229P990X239-3_4N 22.784,-15.371 r180 bottom (schematic designator Q8)
R1 "0402-3.3K" R-0402-10K 9.525,-5.588 r90 top value=3.3k
R2 "0402-0" R-0402-1K -7.239,-7.112 r45 top value=0
R3 "0402-0" R-0402-1K -7.874,-6.477 r45 top value=0
R4 "0402-3.3K" R-0402-10K 8.001,-5.715 r90 top value=3.3k
R5 "0402-0" R-0402-1K -2.921,-10.033 r45 top value=0
R6 "0402-10K" R-0402-10K -2.663,-11.807 r90 top value=10k
R7 "0402-10K" R-0402-10K 11.049,-8.636 r0 top value=10k
R8 "0402-47K" R-0402-10K 33.655,7.747 r90 bottom value=47k
R9 "0402-47K" R-0402-10K 34.667,1.774 r180 bottom value=47k
R10 "0402-47K" R-0402-10K 33.274,-8.001 r270 bottom value=47k
R11 "0402-47K" R-0402-10K 36.322,-4.318 r270 bottom value=47k
R12 "0402-680" R-0402-1K 34.29,-8.001 r90 bottom value=680
R13 "0402-47K" R-0402-10K 36.703,1.778 r180 bottom value=47k
R14 "0402-10K" R-0402-10K 33.528,-11.303 r270 bottom value=10k
R15 "0402-47K" R-0402-10K 37.465,4.826 r90 bottom value=47k
R16 "0402-10K" R-0402-10K 38.481,4.826 r90 bottom value=10k
R17 "0402-10K" R-0402-10K 34.671,2.794 r0 bottom value=10k
R18 "0402-10K" R-0402-10K 37.338,-4.318 r270 bottom value=10k
R19 "0402-680" R-0402-1K 36.068,7.747 r270 bottom value=680
R20 "0402-680" R-0402-1K 36.449,0.254 r90 bottom value=680
R21 "0402-10K" R-0402-10K 38.989,11.557 r90 bottom value=10k
R22 "0402-10K" R-0402-10K 31.496,-2.286 r90 bottom value=10k
R23 "0402-680" R-0402-1K 38.735,1.778 r180 bottom value=680
R24 "0402-10K" R-0402-10K 38.354,-4.191 r90 bottom value=10k
R25_I_PhaseA "0402-1" R-0402-1K 15.367,9.525 r180 top value=1 (schematic designator R25)
R25_I_PhaseB "0402-1" R-0402-1K 16.002,-3.683 r180 top value=1 (schematic designator R25)
R25_I_PhaseC "0402-1" R-0402-1K 14.097,-16.383 r180 top value=1 (schematic designator R25)
R26_I_PhaseA "2512-0.01" FP-WSLP2512R0100FEA-IPC_A 23.241,4.572 r180 bottom value=10m (schematic designator R26)
R26_I_PhaseB "2512-0.01" FP-WSLP2512R0100FEA-IPC_A 25.019,-8.255 r180 bottom value=10m (schematic designator R26)
R26_I_PhaseC "2512-0.01" FP-WSLP2512R0100FEA-IPC_A 23.876,-21.209 r180 bottom value=10m (schematic designator R26)
R27_I_PhaseA "0402-10K" R-0402-10K 15.367,10.541 r0 top value=10k (schematic designator R27)
R27_I_PhaseB "0402-10K" R-0402-10K 15.998,-2.671 r0 top value=10k (schematic designator R27)
R27_I_PhaseC "0402-10K" R-0402-10K 16.256,-16.129 r270 top value=10k (schematic designator R27)
R28 "0402-10K" R-0402-10K 1.524,10.668 r90 bottom value=10k
R29 "0402-22" R-0402-1K 3.15,11.303 r180 bottom value=22
R30 "0402-10K" R-0402-10K 3.531,7.874 r180 bottom value=10k
R31 "0402-1K" R-0402-1K 2.921,10.287 r180 bottom value=1k
R32 "0402-0" R-0402-1K -0.635,-11.938 r270 bottom value=0
R33 "0402-3.3K" R-0402-10K 8.763,15.24 r90 top value=3.3k
R34 "0402-100K" R-0402-10K 3.175,-10.414 r180 bottom value=100k
R35 "0402-0" R-0402-1K -11.43,-5.334 r180 bottom value=0
R36 "0402-3.3K" R-0402-10K -12.065,-16.7 r0 top value=3.3k
R37 "0402-100K" R-0402-10K -9.398,-5.842 r180 bottom value=100k
R38 "0008051031" RESISTOR_0805 -25.527,13.843 r270 bottom value="10 KOhm, 1/8 W"
R39 "0008051031" RESISTOR_0805 -7.493,22.86 r270 bottom value="10 KOhm, 1/8 W"
R40 "0008051031" RESISTOR_0805 -2.794,-6.731 r0 bottom value="10 KOhm, 1/8 W"
R41_ESP_USB "0402-10K" R-0402-10K -10.287,-20.447 r180 bottom value=10k (schematic designator R41)
R41_STM_USB "0402-10K" R-0402-10K 0.381,-20.32 r180 bottom value=10k (schematic designator R41)
R42_ESP_USB "0402-10K" R-0402-10K -10.033,-16.764 r180 top value=10k (schematic designator R42)
R42_STM_USB "0402-10K" R-0402-10K 0.889,-15.748 r180 top value=10k (schematic designator R42)
R43_ESP_USB "0402-10K" R-0402-10K -5.461,-15.748 r0 top value=10k (schematic designator R43)
R43_STM_USB "0402-10K" R-0402-10K 5.588,-16.637 r0 top value=10k (schematic designator R43)
R44_ESP_USB "0402-22" R-0402-1K -9.021,-17.653 r180 top value=22 (schematic designator R44)
R44_STM_USB "0402-22" R-0402-1K 2.286,-17.526 r180 top value=22 (schematic designator R44)
R45_ESP_USB "0402-22" R-0402-1K -6.477,-17.653 r0 top value=22 (schematic designator R45)
R45_STM_USB "0402-22" R-0402-1K 4.318,-17.526 r0 top value=22 (schematic designator R45)
R46_ESP_USB "0402-10K" R-0402-10K -10.033,-15.875 r0 top value=10k (schematic designator R46)
R46_STM_USB "0402-10K" R-0402-10K 0.889,-16.637 r0 top value=10k (schematic designator R46)
R47_ESP_USB "0402-10K" R-0402-10K -5.461,-16.891 r180 top value=10k (schematic designator R47)
R47_STM_USB "0402-10K" R-0402-10K 5.588,-15.748 r180 top value=10k (schematic designator R47)
R48_ESP_USB "0402-10K" R-0402-10K -5.08,-20.447 r180 bottom value=10k (schematic designator R48)
R48_STM_USB "0402-10K" R-0402-10K 6.604,-17.78 r180 top value=10k (schematic designator R48)
R49 "0402-470K" R-0402-10K 6.604,12.7 r180 top value=470k
R50 "0402-10K" R-0402-10K 6.477,17.907 r0 top value=10k
R51 "0402-10K" R-0402-10K -16.891,1.016 r180 top value=10k
R52 "0402-10K" R-0402-10K 6.604,14.732 r0 top value=10k
R53 "0402-4.7K" R-0402-10K 7.747,19.812 r90 top value=4.7k
R54 "0402-10K" R-0402-10K 6.481,16.895 r180 top value=10k
R55 "0402-10K" R-0402-10K 6.604,15.748 r180 top value=10k
R56 "0402-10K" R-0402-10K 6.604,13.716 r180 top value=10k
R57_PhaseA "0402-100" R-0402-1K 12.954,21.082 r180 bottom value=100 (schematic designator R57)
R57_PhaseB "0402-100" R-0402-1K 13.716,6.731 r180 bottom value=100 (schematic designator R57)
R57_PhaseC "0402-100" R-0402-1K 13.462,-7.366 r180 bottom value=100 (schematic designator R57)
R58_PhaseA "0402-10K" R-0402-10K 12.954,19.939 r180 bottom value=10k (schematic designator R58)
R58_PhaseB "0402-10K" R-0402-10K 13.716,5.588 r180 bottom value=10k (schematic designator R58)
R58_PhaseC "0402-10K" R-0402-10K 13.335,-8.509 r180 bottom value=10k (schematic designator R58)
R59_PhaseA "0402-100" R-0402-1K 26.416,15.367 r0 bottom value=100 (schematic designator R59)
R59_PhaseB "0402-100" R-0402-1K 21.789,1.651 r270 bottom value=100 (schematic designator R59)
R59_PhaseC "0402-100" R-0402-1K 22.606,-10.668 r0 bottom value=100 (schematic designator R59)
R60_PhaseA "0402-10K" R-0402-10K 28.448,15.367 r180 bottom value=10k (schematic designator R60)
R60_PhaseB "0402-10K" R-0402-10K 29.718,-3.81 r0 bottom value=10k (schematic designator R60)
R60_PhaseC "0402-10K" R-0402-10K 29.972,-16.764 r0 bottom value=10k (schematic designator R60)
R61 "0402-3.3K" R-0402-10K -22.098,-18.161 r270 bottom value=3.3k
R62 "0402-0" R-0402-1K -15.117,-12.954 r0 bottom value=0
R63 "0402-0" R-0402-1K -15.903,-9.906 r180 bottom value=0
R64 "0402-0" R-0402-1K -17.526,-22.606 r180 bottom value=0
R65 "0402-0" R-0402-1K -14.859,-21.209 r270 bottom value=0
R66 "0402-0" R-0402-1K -15.903,-10.922 r180 bottom value=0
R67 "0402-10K" R-0402-10K -16.256,-24.257 r180 bottom value=10k
R68 "0402-10K" R-0402-10K -24.765,-23.495 r270 bottom value=10k
R69 "0402-3.3K" R-0402-10K -21.971,-20.701 r90 top value=3.3k
R70 "0402-0" R-0402-1K -15.903,-11.938 r180 bottom value=0
R71 "0402-0" R-0402-1K -19.304,-23.114 r90 bottom value=0
R72 "0402-3.3K" R-0402-10K -22.733,-19.177 r0 top value=3.3k
R73 "0402-3.3K" R-0402-10K -21.975,-22.729 r90 top value=3.3k
U1 "STM32G431CBU6" QFN50P700X700X60-49N -2.591,-4.02 r135 top
U2 "B3U-1000P" SODFL4025X160N 8.509,-11.557 r90 top
U3 "MCP601T-I/OT" SOT95P280X145-5N 37.338,-10.414 r0 bottom
U4 "MCP601T-I/OT" SOT95P280X145-5N 35.687,11.303 r180 bottom
U5 "MCP601T-I/OT" SOT95P280X145-5N 33.782,-3.429 r270 bottom
U6 "MCP601T-I/OT" SOT95P280X145-5N 39.624,-0.762 r0 bottom
U7_I_PhaseA "INA240A1PW" SOP65P640X120-8N 20.955,11.43 r180 top (schematic designator U7)
U7_I_PhaseB "INA240A1PW" SOP65P640X120-8N 21.336,-2.794 r180 top (schematic designator U7)
U7_I_PhaseC "INA240A1PW" SOP65P640X120-8N 21.844,-15.621 r180 top (schematic designator U7)
U8 "MCP601T-I/OT" SOT95P280X145-5N 6.325,10.287 r0 bottom
U9 "L7805ACD2T_TO-263" TO-263 -7.366,4.699 r180 bottom value="5V, 1.5A"
U10 "RT9013-33GB" SOT94P279X129-5N 2.032,-12.7 r0 bottom
U11 "RT9013-33GB" SOT94P279X129-5N -11.811,-8.001 r270 bottom
U12_ESP_USB "SMF05CT1G" SOT65P210X110-6N -7.874,-15.24 r270 top (schematic designator U12)
U12_STM_USB "SMF05CT1G" SOT65P210X110-6N 3.175,-15.24 r270 top (schematic designator U12)
U13 "SSD1306_China" SSD1306_China-Footprint-1 -18.187,10.16 r0 top
U14_PhaseA "IR2104SPBF" IR2104SPBF 21.336,17.272 r0 top (schematic designator U14)
U14_PhaseB "IR2104SPBF" IR2104SPBF 21.463,4.953 r0 top (schematic designator U14)
U14_PhaseC "IR2104SPBF" IR2104SPBF 21.209,-9.398 r0 top (schematic designator U14)
U15 "ESP32-C3FH4" QFN50P500X500X90-33N -17.506,-14.192 r0 top
U16 "W25Q128JVSIQ" SOIC127P790X216-8N -18.796,-17.448 r270 bottom
U17 "B3U-1000P" SODFL4025X160N -20.193,-21.717 r90 top
U18 "B3U-1000P" SODFL4025X160N -14.351,-21.717 r90 top
U19 "B3U-1000P" SODFL4025X160N -17.272,-21.717 r90 top
Y1 "3225-8Mhz" FP-NX3225SA-MFG 3.937,-10.287 r315 top
Y2 "FC135-32.7680K" FP-FC-135-MFG 1.016,-12.065 r315 top
Y3 "FC135-32.7680K" FP-FC-135-MFG -25.4,-20.447 r270 top
Y4 "3225-40Mhz" FP-NX3225SA-MFG -15.621,-7.239 r180 top

## Footprints (in the part's own frame and the unit in brackets; to place one, negate y for a bottom-side part, rotate by r counter-clockwise, add the part's x,y. Pads: shape width x height; smd on the part's side, far side on the other; paste and mask are expansions set on the pad)
1N5819W [mm]
  rect 1.12x0.99 smd: A(1.57,0) K(-1.57,0)
  silkscreen extent -2.85,-0.9 1.4,0.9, body extent -1.8,-0.9 1.8,0.9, height 1.1
0154007.DR [mm]
  rect 4.24x3.81 smd: 1(-3.185,0) 2(3.185,0)
  silkscreen extent -4.86,-2.51 4.86,2.51, body extent -4.86,-2.51 4.86,2.51, height 3.81
648104131822 [mm] "1.50mm SMT Male Horizontal Shrouded Header, 4p"
  rect 0.7x2.6 smd: 1(-2.25,2.65) 2(-0.75,2.65) 3(0.75,2.65) 4(2.25,2.65)
  rect 1.1x1.9 smd: MP1(-4.2,-1) MP2(4.2,-1)
  silkscreen extent -4.65,-3.13 4.65,3.13, body extent -4.61,-3 4.6,3.47, height 3.74
648107131822 [mm] "1.50mm SMT Male Horizontal Shrouded Header, 7p"
  rect 0.7x2.6 smd: 1(-4.5,2.65) 2(-3,2.65) 3(-1.5,2.65) 4(0,2.65) 5(1.5,2.65) 6(3,2.65) 7(4.5,2.65)
  rect 1.1x1.9 smd: MP1(-6.45,-1) MP2(6.45,-1)
  silkscreen extent -6.9,-3.13 6.9,3.13, body extent -6.85,-3 6.85,3.47, height 3.74
CAP_0805 [mm]
  rect 0.9x1.3 smd: 1(-0.975,-0.025) 2(0.925,-0.025)
  silkscreen extent -1.63,-0.86 1.57,0.81, body extent -1.03,-0.65 0.97,0.6, height 0.6
CAPC0402(1005)60_N [mm] "Chip Capacitor, Body 1.0x0.5mm, Height 0.6mm, IPC Medium Density"
  rect 0.62x0.62 smd: 1(-0.45,0) 2(0.45,0)
  body extent -0.55,-0.3 0.55,0.3, height 0.6
CAPMP3216X180N [mm]
  rect 1.79x1.21 smd: 1(-1.31,0) 2(1.31,0)
  silkscreen extent -2.8,-0.8 0.1,0.8, body extent -1.6,-0.8 1.6,0.8, height 1.8
CAPPC3528X210N [mm]
  rect 1.34x3.02 smd: 1(-1.54,0) 2(1.54,0)
  silkscreen extent -0.55,-1.5 0.55,1.5, body extent -1.75,-1.4 1.75,1.4, height 2.1
"Copy of INDC1608X80N" [mm]
  rect 0.94x1.02 smd: 1(-0.79,0) 2(0.79,0) 3(-0.254,-1.524)
  body extent -0.57,-1.64 1.13,0.06, height 0.83
DIOM4325X250N [mm]
  rect 2.12x1.5 smd: A(2.115,0) C(-2.115,0)
  silkscreen extent -4,-1.28 2.16,1.28, body extent -2.57,-1.28 2.57,1.28, height 2.5
DPAK [mil]
  rect 63x118 smd: 1(-89,-194) 3(87,-194)
  rect 214.63x275.59 smd: 4(0,72.94)
  silkscreen extent -130,-118 130,126, body extent -130,-198 130,198, height 94
FER_0603 [mm]
  rect 0.8x0.8 smd: 1(-0.801,0.076) 2(0.699,0.076)
  silkscreen extent -1.4,-0.51 1.3,0.66, body extent -0.85,-0.32 0.75,0.48, height 0.8
FP-BLM18-0_15-t0_8-MFG [mm]
  rect 0.65x0.7 smd paste+0 mask+0: 1(-0.675,0) 2(0.675,0)
  silkscreen extent -0.87,-0.72 0.87,0.72, body extent -0.8,-0.4 0.8,0.4, height 0.95
FP-FC-135-MFG [mm]
  rect 1x1.8 smd paste+0 mask+0: 1(-1.25,0) 2(1.25,0)
  silkscreen extent -0.38,-0.8 0.38,0.8, body extent -1.85,-1 1.85,1, height 0.25
FP-NX3225SA-MFG [mm]
  rect 1.4x1.2 smd paste+0 mask+0: 1(-1.1,-0.8) 2(1.1,-0.8) 3(1.1,0.8) 4(-1.1,0.8)
  silkscreen extent -1.22,-2.02 0.03,1.3, body extent -1.9,-1.5 1.9,1.5, height 0.25
FP-WSLP2512R0100FEA-IPC_A [mm]
  rect 1.824x3.539 smd paste+0 mask+0: 1(-2.943,0) 2(2.943,0)
  silkscreen extent -1.73,-1.77 1.73,1.77, body extent -3.18,-1.59 3.18,1.59, height 0.89
Fuse_SMD_0805 [mil] "Fuse SMD, size 0805"
  rect 30x70 smd: 0(-42,0) 1(41,0)
  silkscreen extent -62,-40 62,41, body extent -43,-31 43,29, height 20
HB9500-2 [mm] "High Power Terminal , 25A , 300V"
  rect 4x2 hole 0.8 square: 1(0,0) 2(9.5,0)
  silkscreen extent -5.59,-5.21 15.11,10.92, body extent -5.5,-5.12 15,10.87, height 18.2
HB9500-3 [mm]
  rect 4x2 hole 0.8 square: 1(0,0) 2(9.5,0) 3(19,0)
  silkscreen extent -5.59,-5.21 24.51,10.92, body extent -5.5,-5.12 24.5,10.87, height 23.2
IFA-2.4Ghz-Footprint-1 [mm]
  rect 0.9x0.5 smd: GND(-0.058,-0.004)
  rect 0.5x0.5 smd: SIG(-1.458,-0.004)
  Top Layer region: -13.508,4.619 -14.008,4.619 -14.008,0.579 -13.508,0.579
  Top Layer region: -11.308,4.579 -11.808,4.579 -11.808,1.879 -11.308,1.879
  Top Layer region: -14.008,5.019 -14.008,4.519 -11.308,4.519 -11.308,5.019
  Top Layer region: -11.408,2.379 -11.408,1.879 -9.208,1.879 -9.208,2.379
  Top Layer region: -6.608,4.579 -7.108,4.579 -7.108,1.879 -6.608,1.879
  Top Layer region: -4.108,4.629 -4.608,4.629 -4.608,1.879 -4.108,1.879
  Top Layer region: -1.208,4.569 -1.708,4.569 -1.708,-0.381 -1.208,-0.381
  Top Layer region: 0.392,5.019 -4.608,5.019 -4.608,4.519 0.392,4.519
  Top Layer region: -6.658,2.379 -6.658,1.879 -4.458,1.879 -4.458,2.379
  Top Layer region: -9.308,5.019 -9.308,4.519 -6.608,4.519 -6.608,5.019
  Top Layer region: -8.808,4.579 -9.308,4.579 -9.308,1.879 -8.808,1.879
  Top Layer region: 0.392,4.578 -0.508,4.578 -0.508,-0.381 0.392,-0.381
  Keep-Out Layer region: 0.824,7.691 -14.224,7.691 -14.224,0.381 0.824,0.381
  Keep-Out Layer lines w0.254: -14.208,7.743 0.892,7.743 0.892,0.508 -14.264,0.508 -14.308,7.719
  silkscreen extent -14.34,0.11 0.9,7.73
INDC1608X80N [mm]
  rect 0.94x1.02 smd: 1(-0.79,0) 2(0.79,0)
  body extent -0.8,-0.38 0.8,0.42, height 0.83
IPEX_20279-001E-03 [mm]
  rect 1x1.05 smd: 1(0,-1.525)
  rect 1.05x2.2 smd: 2(1.475,0) 3(-1.475,0)
  Keep-Out Layer region: 0.95,-1 -0.95,-1 -0.95,1.1 0.95,1.1
  silkscreen extent -0.7,-2.71 0.7,1.55, body extent -1.5,-1.55 1.5,1.55, height 1.25
IR2104SPBF [mm]
  rect 1.78x0.72 smd paste-2: 1(-2.34,1.905) 2(-2.34,0.635) 3(-2.34,-0.635) 4(-2.34,-1.905) 5(2.34,-1.905) 6(2.34,-0.635) 7(2.34,0.635) 8(2.34,1.905)
  silkscreen extent -2.55,-2.45 1.15,2.9, body extent -3,-2.5 3,2.5, height 1.75
MOLEX_2171790001 [mm]
  rect 0.59x1.15 smd mask+0.064: A1B12(-3.2,3.425) A4B9(-2.4,3.425) B1A12(3.2,3.425) B4A9(2.4,3.425)
  rect 0.298x1.15 smd mask+0.064: A5(-1.25,3.425) A6(-0.25,3.425) A7(0.25,3.425) A8(1.25,3.425) B5(1.75,3.425) B6(0.75,3.425) B7(-0.75,3.425) B8(-1.75,3.425)
  oval 1x2.2 hole 0.6 slot 1.8 at 90 deg mask+0.064: SH1(-4.32,-1.15) SH2(4.32,-1.15)
  oval 1x1.8 hole 0.6 slot 1.4 at 90 deg mask+0.064: SH3(-4.32,2.85) SH4(4.32,2.85)
  silkscreen extent -4.62,-3.4 4.62,1.63, body extent -4.47,-3.25 4.47,3.5, height 3.24
QFN50P500X500X90-33N [mm]
  rrect25% 0.81x0.27 smd mask+0: 1(-2.445,1.75) 2(-2.445,1.25) 3(-2.445,0.75) 4(-2.445,0.25) 5(-2.445,-0.25) 6(-2.445,-0.75) 7(-2.445,-1.25) 8(-2.445,-1.75) 17(2.445,-1.75) 18(2.445,-1.25) 19(2.445,-0.75) 20(2.445,-0.25) 21(2.445,0.25) 22(2.445,0.75) 23(2.445,1.25) 24(2.445,1.75)
  rrect25% 0.27x0.81 smd mask+0: 9(-1.75,-2.445) 10(-1.25,-2.445) 11(-0.75,-2.445) 12(-0.25,-2.445) 13(0.25,-2.445) 14(0.75,-2.445) 15(1.25,-2.445) 16(1.75,-2.445) 25(1.75,2.445) 26(1.25,2.445) 27(0.75,2.445) 28(0.25,2.445) 29(-0.25,2.445) 30(-0.75,2.445) 31(-1.25,2.445) 32(-1.75,2.445)
  rect 3.7x3.7 smd paste-0.68 mask+0.05: 33(0,0)
  silkscreen extent -3.5,-2.5 2.5,2.5, body extent -2.5,-2.5 2.5,2.5, height 0.9
QFN50P700X700X60-49N [mm]
  rect 0.86x0.27 smd mask+0.05: 1(-3.435,2.75) 2(-3.435,2.25) 3(-3.435,1.75) 4(-3.435,1.25) 5(-3.435,0.75) 6(-3.435,0.25) 7(-3.435,-0.25) 8(-3.435,-0.75) 9(-3.435,-1.25) 10(-3.435,-1.75) 11(-3.435,-2.25) 12(-3.435,-2.75) 25(3.435,-2.75) 26(3.435,-2.25) 27(3.435,-1.75) 28(3.435,-1.25) 29(3.435,-0.75) 30(3.435,-0.25) 31(3.435,0.25) 32(3.435,0.75) 33(3.435,1.25) 34(3.435,1.75) 35(3.435,2.25) 36(3.435,2.75)
  rect 0.27x0.86 smd mask+0.05: 13(-2.75,-3.435) 14(-2.25,-3.435) 15(-1.75,-3.435) 16(-1.25,-3.435) 17(-0.75,-3.435) 18(-0.25,-3.435) 19(0.25,-3.435) 20(0.75,-3.435) 21(1.25,-3.435) 22(1.75,-3.435) 23(2.25,-3.435) 24(2.75,-3.435) 37(2.75,3.435) 38(2.25,3.435) 39(1.75,3.435) 40(1.25,3.435) 41(0.75,3.435) 42(0.25,3.435) 43(-0.25,3.435) 44(-0.75,3.435) 45(-1.25,3.435) 46(-1.75,3.435) 47(-2.25,3.435) 48(-2.75,3.435)
  rect 5.6x5.6 smd paste-4 mask+0.05: 49(0,0)
  silkscreen extent -4.6,-3.5 3.5,3.5, body extent -3.5,-3.5 3.5,3.5, height 0.65
R-0402-1K [mm]
  rect 0.475x0.5 smd: 1(-0.512,0) 2(0.512,0)
  silkscreen extent -0.89,-0.38 0.89,0.38, body extent -0.5,-0.25 0.5,0.25, height 0.35
R-0402-10K [mm]
  rect 0.475x0.5 smd: 1(-0.512,0.004) 2(0.512,0.004)
  silkscreen extent -0.89,-0.38 0.89,0.39, body extent -0.5,-0.25 0.5,0.25, height 0.35
RESISTOR_0805 [mm] "Chip Resistor, 2-Leads, Body 2,00x1,20mm, IPC Medium Density"
  rect 1.1x1.3 smd: 1(-0.85,0) 2(0.85,0)
  silkscreen extent -1.65,-0.9 1.65,0.9, body extent -1,-0.65 1,0.65, height 0.45
SOD-80_MiniMELF_Glass [mm]
  rrect25% 1.2x1.7 smd: A(1.7,0) K(-1.7,0)
  silkscreen extent -2.65,-1.2 2,1.2, body extent -1.85,-0.8 1.85,0.8, height 1.63
SODFL3816X120N [mm]
  rect 0.97x0.73 smd: A(1.72,0) C(-1.72,0)
  silkscreen extent -3.3,-0.8 1.35,0.8, body extent -1.9,-0.8 1.9,0.8, height 1.1
SODFL4025X160N [mm]
  rrect45% 1.11x1.51 smd paste-2 mask+0: 1(-1.7,0) 2(1.7,0)
  silkscreen extent -2.85,-1.25 1.5,1.25, body extent -2,-1.25 2,1.25, height 1.6
SOIC127P790X216-8N [mm]
  rrect25% 1.61x0.58 smd: 1(-3.605,1.905) 2(-3.605,0.635) 3(-3.605,-0.635) 4(-3.605,-1.905) 5(3.605,-1.905) 6(3.605,-0.635) 7(3.605,0.635) 8(3.605,1.905)
  silkscreen extent -5.31,-2.64 2.64,2.64, body extent -3.95,-2.64 3.95,2.64, height 2.16
SOP65P640X120-8N [mm]
  rrect25% 1.57x0.41 smd: 1(-2.87,0.975) 2(-2.87,0.325) 3(-2.87,-0.325) 4(-2.87,-0.975) 5(2.87,-0.975) 6(2.87,-0.325) 7(2.87,0.325) 8(2.87,0.975)
  silkscreen extent -4.54,-1.5 2.2,1.5, body extent -3.2,-1.5 3.2,1.5, height 1.2
SOT65P210X110-6N [mm]
  rrect50% 1.06x0.39 smd: 1(-0.935,0.65) 2(-0.935,0) 3(-0.935,-0.65) 4(0.935,-0.65) 5(0.935,0) 6(0.935,0.65)
  silkscreen extent -0.68,-1.1 0.68,1.1, body extent -1.05,-1 1.05,1, height 1.1
SOT94P279X129-5N [mm]
  rrect25% 1.22x0.65 smd: 1(-1.245,0.94) 2(-1.245,0) 3(-1.245,-0.94) 4(1.245,-0.94) 5(1.245,0.94)
  silkscreen extent -2.5,-1.58 0.9,1.58, body extent -1.4,-1.45 1.4,1.45, height 1.3
SOT95P280X125-3N [mm]
  rrect25% 1.21x0.59 smd: 1(-1.255,0.95) 2(-1.255,-0.95) 3(1.255,0)
  silkscreen extent -2.6,-1.56 0.9,1.56, body extent -1.4,-1.45 1.4,1.45, height 1.25
SOT95P280X145-5N [mm]
  rrect50% 1.22x0.6 smd: 1(-1.245,0.95) 2(-1.245,0) 3(-1.245,-0.95) 4(1.245,-0.95) 5(1.245,0.95)
  silkscreen extent -2.6,-1.57 0.88,1.57, body extent -1.35,-1.45 1.35,1.45, height 1.45
SSD1306_China-Footprint-1 [mm]
  rrect50% 0.25x1.5 smd: 1(0,0) 2(0.707,0) 3(1.414,0) 4(2.121,0) 5(2.828,0) 6(3.535,0) 7(4.242,0) 8(4.949,0) 9(5.656,0) 10(6.363,0) 11(7.07,0) 12(7.777,0) 13(8.484,0) 14(9.191,0) 15(9.898,0) 16(10.605,0) 17(11.312,0) 18(12.019,0) 19(12.726,0) 20(13.433,0) 21(14.14,0) 22(14.847,0) 23(15.554,0) 24(16.261,0) 25(16.968,0) 26(17.675,0) 27(18.382,0) 28(19.089,0) 29(19.796,0) 30(20.503,0)
  body extent -2.5,-6.12 23.2,15.68, height 1.75
TO229P990X239-3_4N [mm]
  rrect25% 2.83x0.97 smd: 1(-4.14,2.29) 3(-4.14,-2.29)
  rect 6.1x5.63 smd paste-4: 4(2.51,0)
  silkscreen extent -6.65,-3.27 3.87,3.27, body extent -4.95,-3.27 4.95,3.27, height 2.39
TO-263 [mm] "D2PAK"
  rect 3.5x1.6 smd: 1(-6.7,2.54) 2(-6.7,-2.54)
  rect 9.75x12.2 smd paste-7: 3(3.575,0)
  silkscreen extent -6.48,-5 -2.51,5, body extent -7.71,-5.1 7.71,5.1, height 4.6
WCAP-ASLI_D4H5.5 [mm] "Aluminium Electrolytic V-Chip SMT Capacitors, 4x5.5mm"
  rect 2.6x1.6 smd: 1(1.8,0) 2(-1.8,0)
  silkscreen extent -2.25,-2.25 2.25,2.25, body extent -2.5,-2.15 2.5,2.15, height 5.5
WL-SMCW_0603_H=0.7mm [mm] "SMD Mono-color Chip LED, body 1.6x0.8mm"
  rect 0.8x0.8 smd: 1(-0.8,0) 2(0.8,0)
  silkscreen extent -1.4,-0.58 1.4,0.58, body extent -0.8,-0.4 0.8,0.4, height 0.7